# Altium PCB VCU.PcbDoc (part 1 of 2)
Units mm, origin at the board's own origin, x right, y up, seen from the top; angles counter-clockwise.
Board outline 100 x 100 mm, 4 copper layers (Top Layer, Layer 1, Layer 2, Bottom Layer), stack 1.25 mm thick; 153 components, 112 nets, 484 pads, 403 vias.
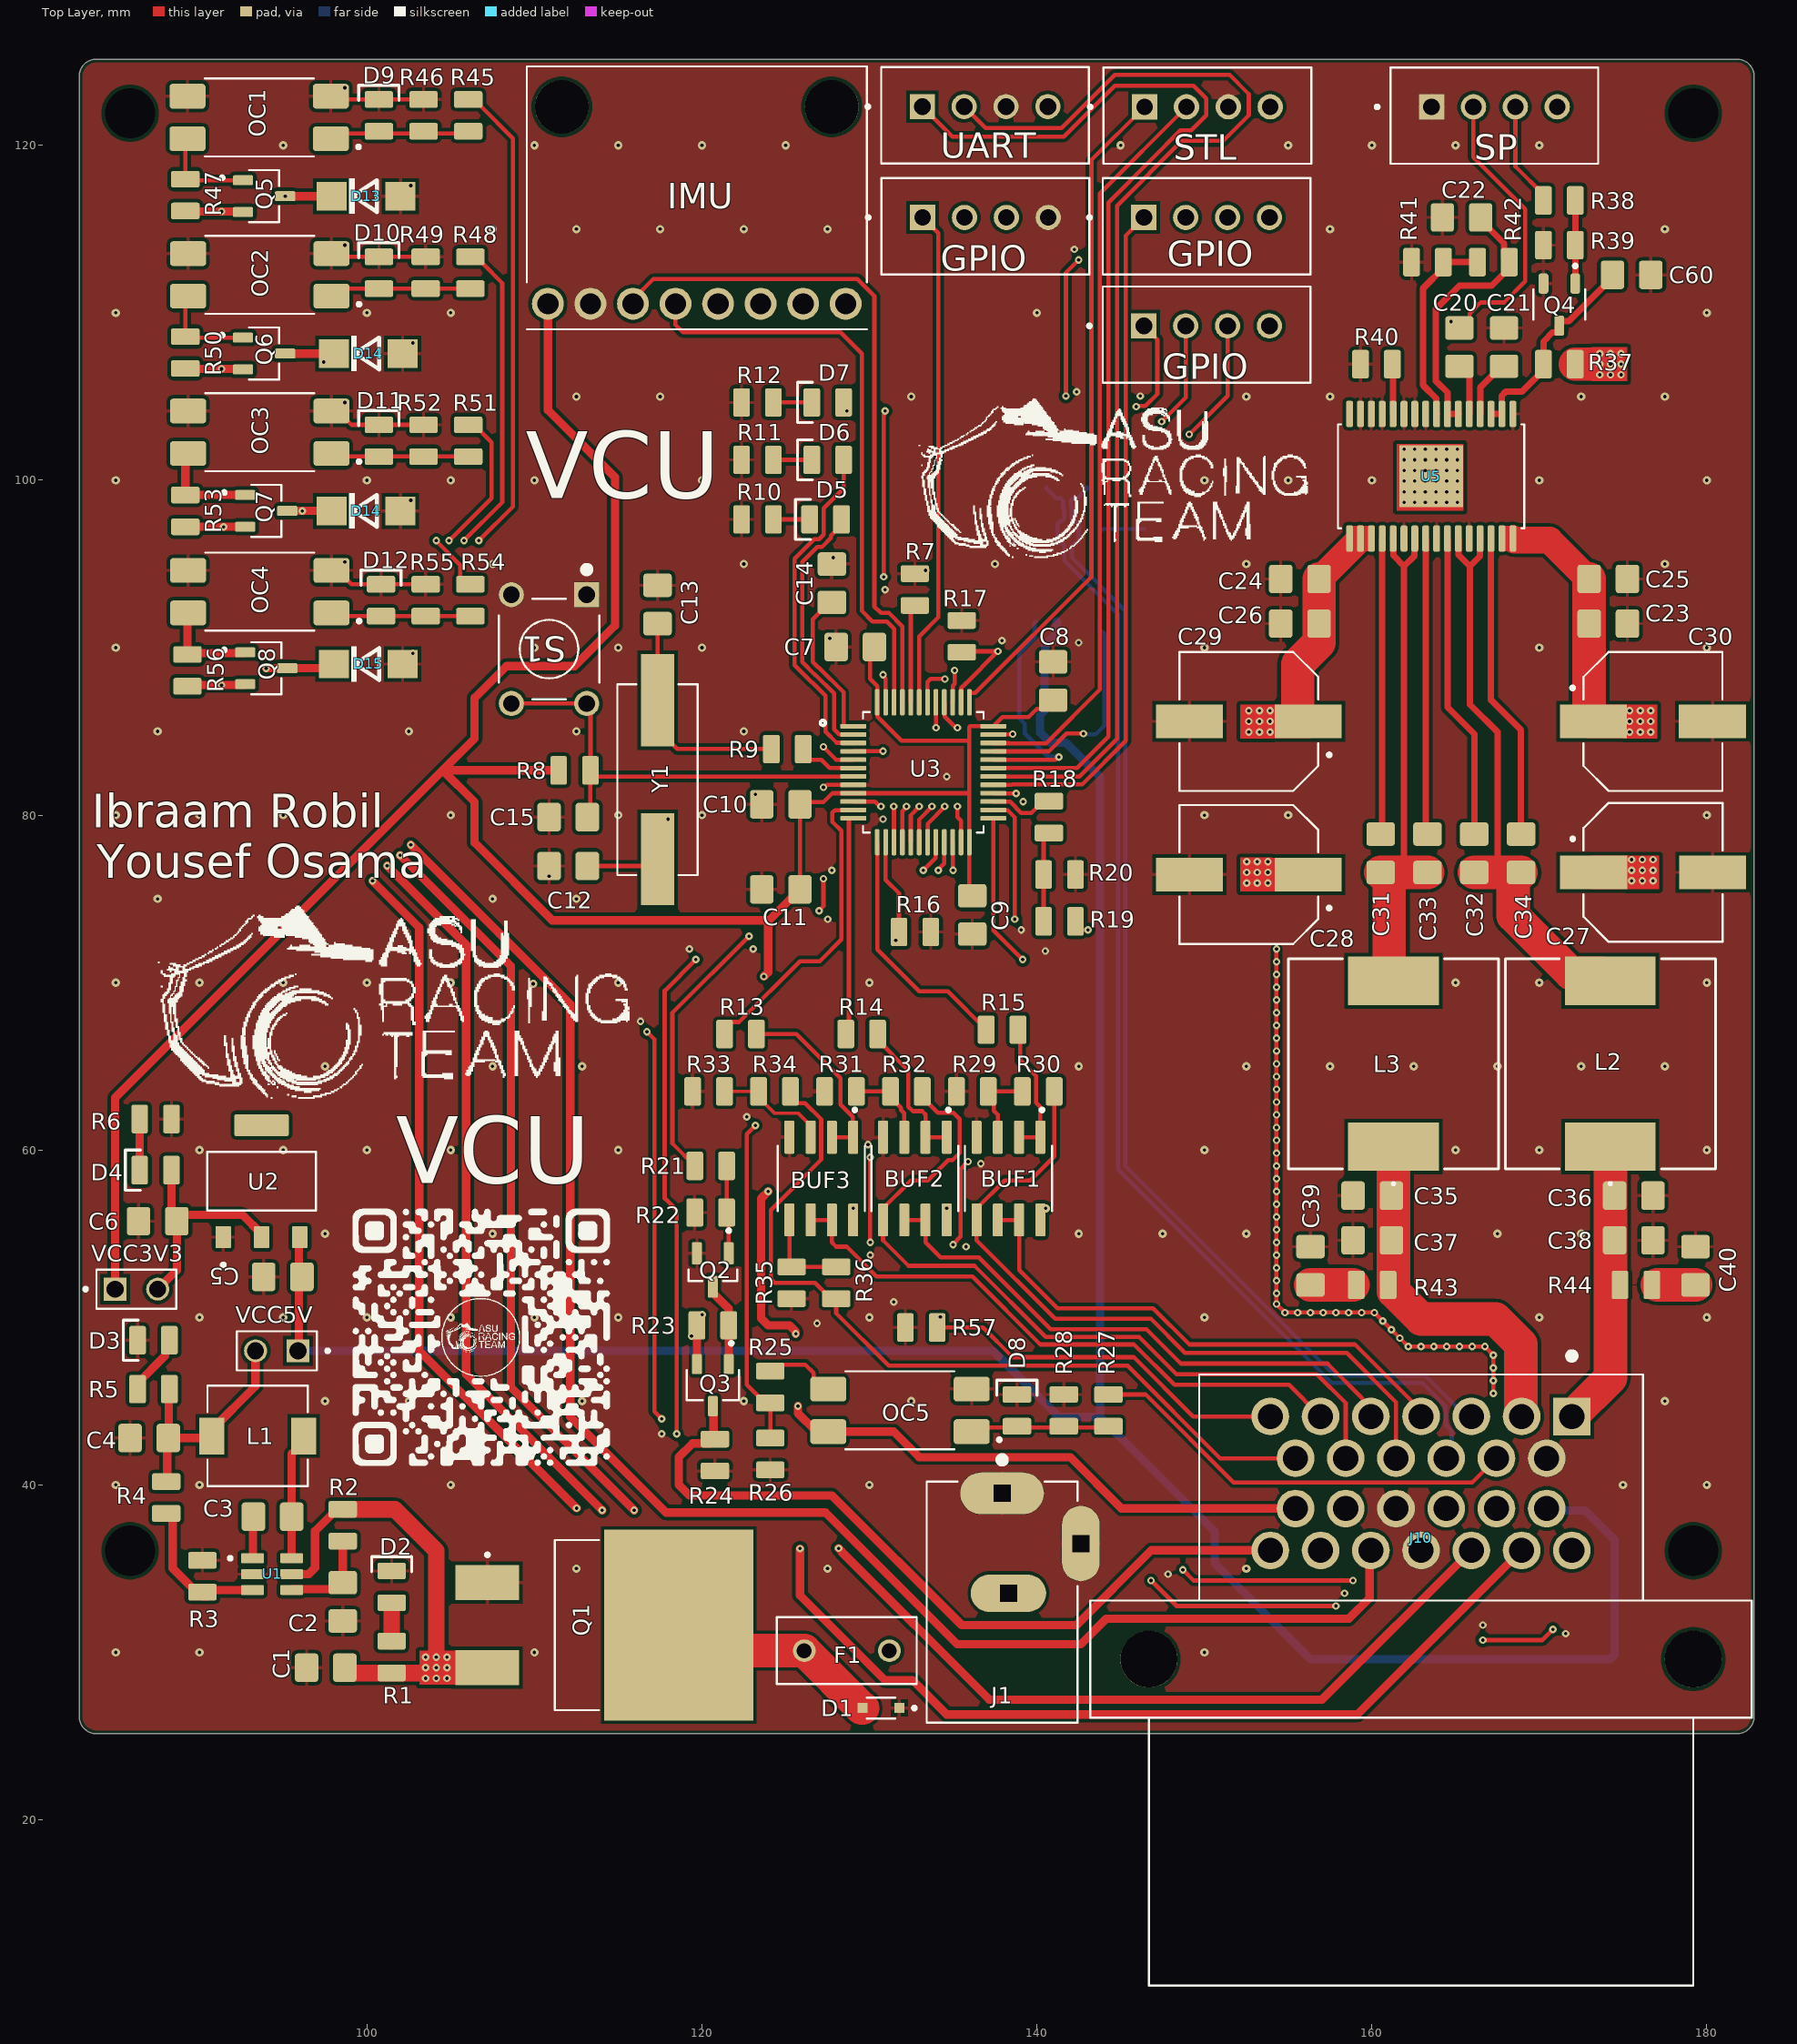
[diagram p0: Top Layer view]
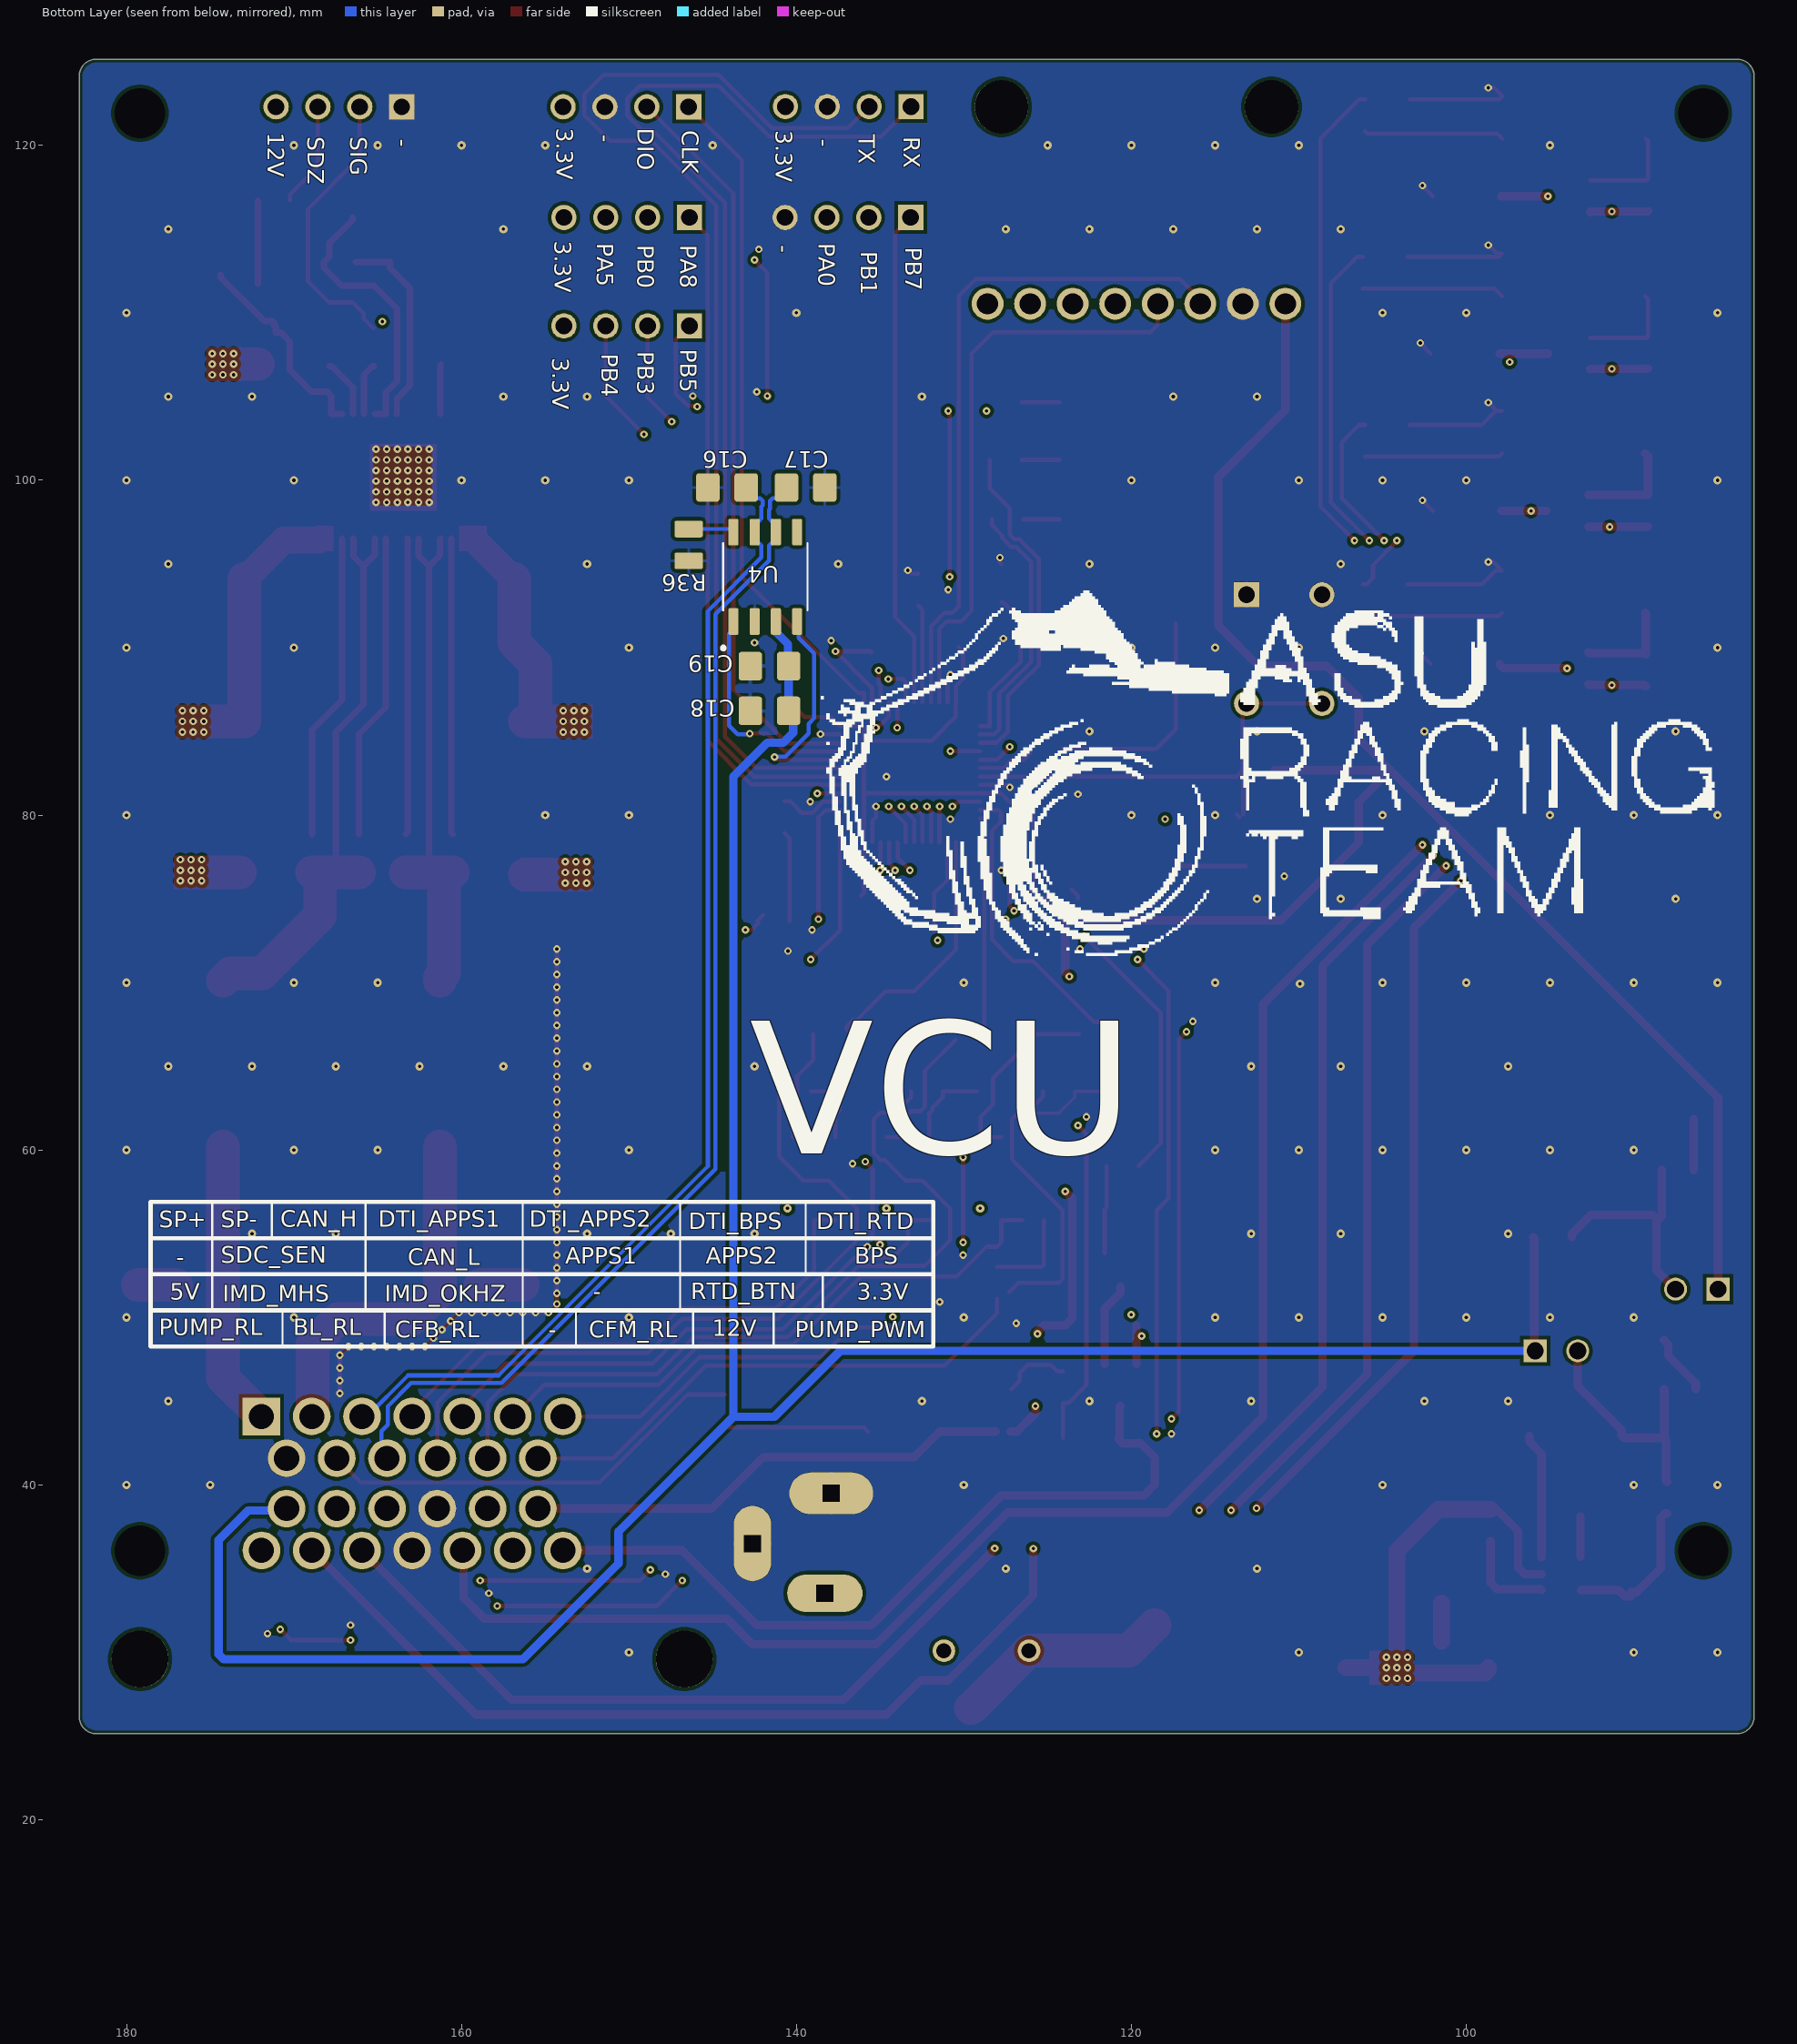
[diagram p1: Bottom Layer view, seen from below]
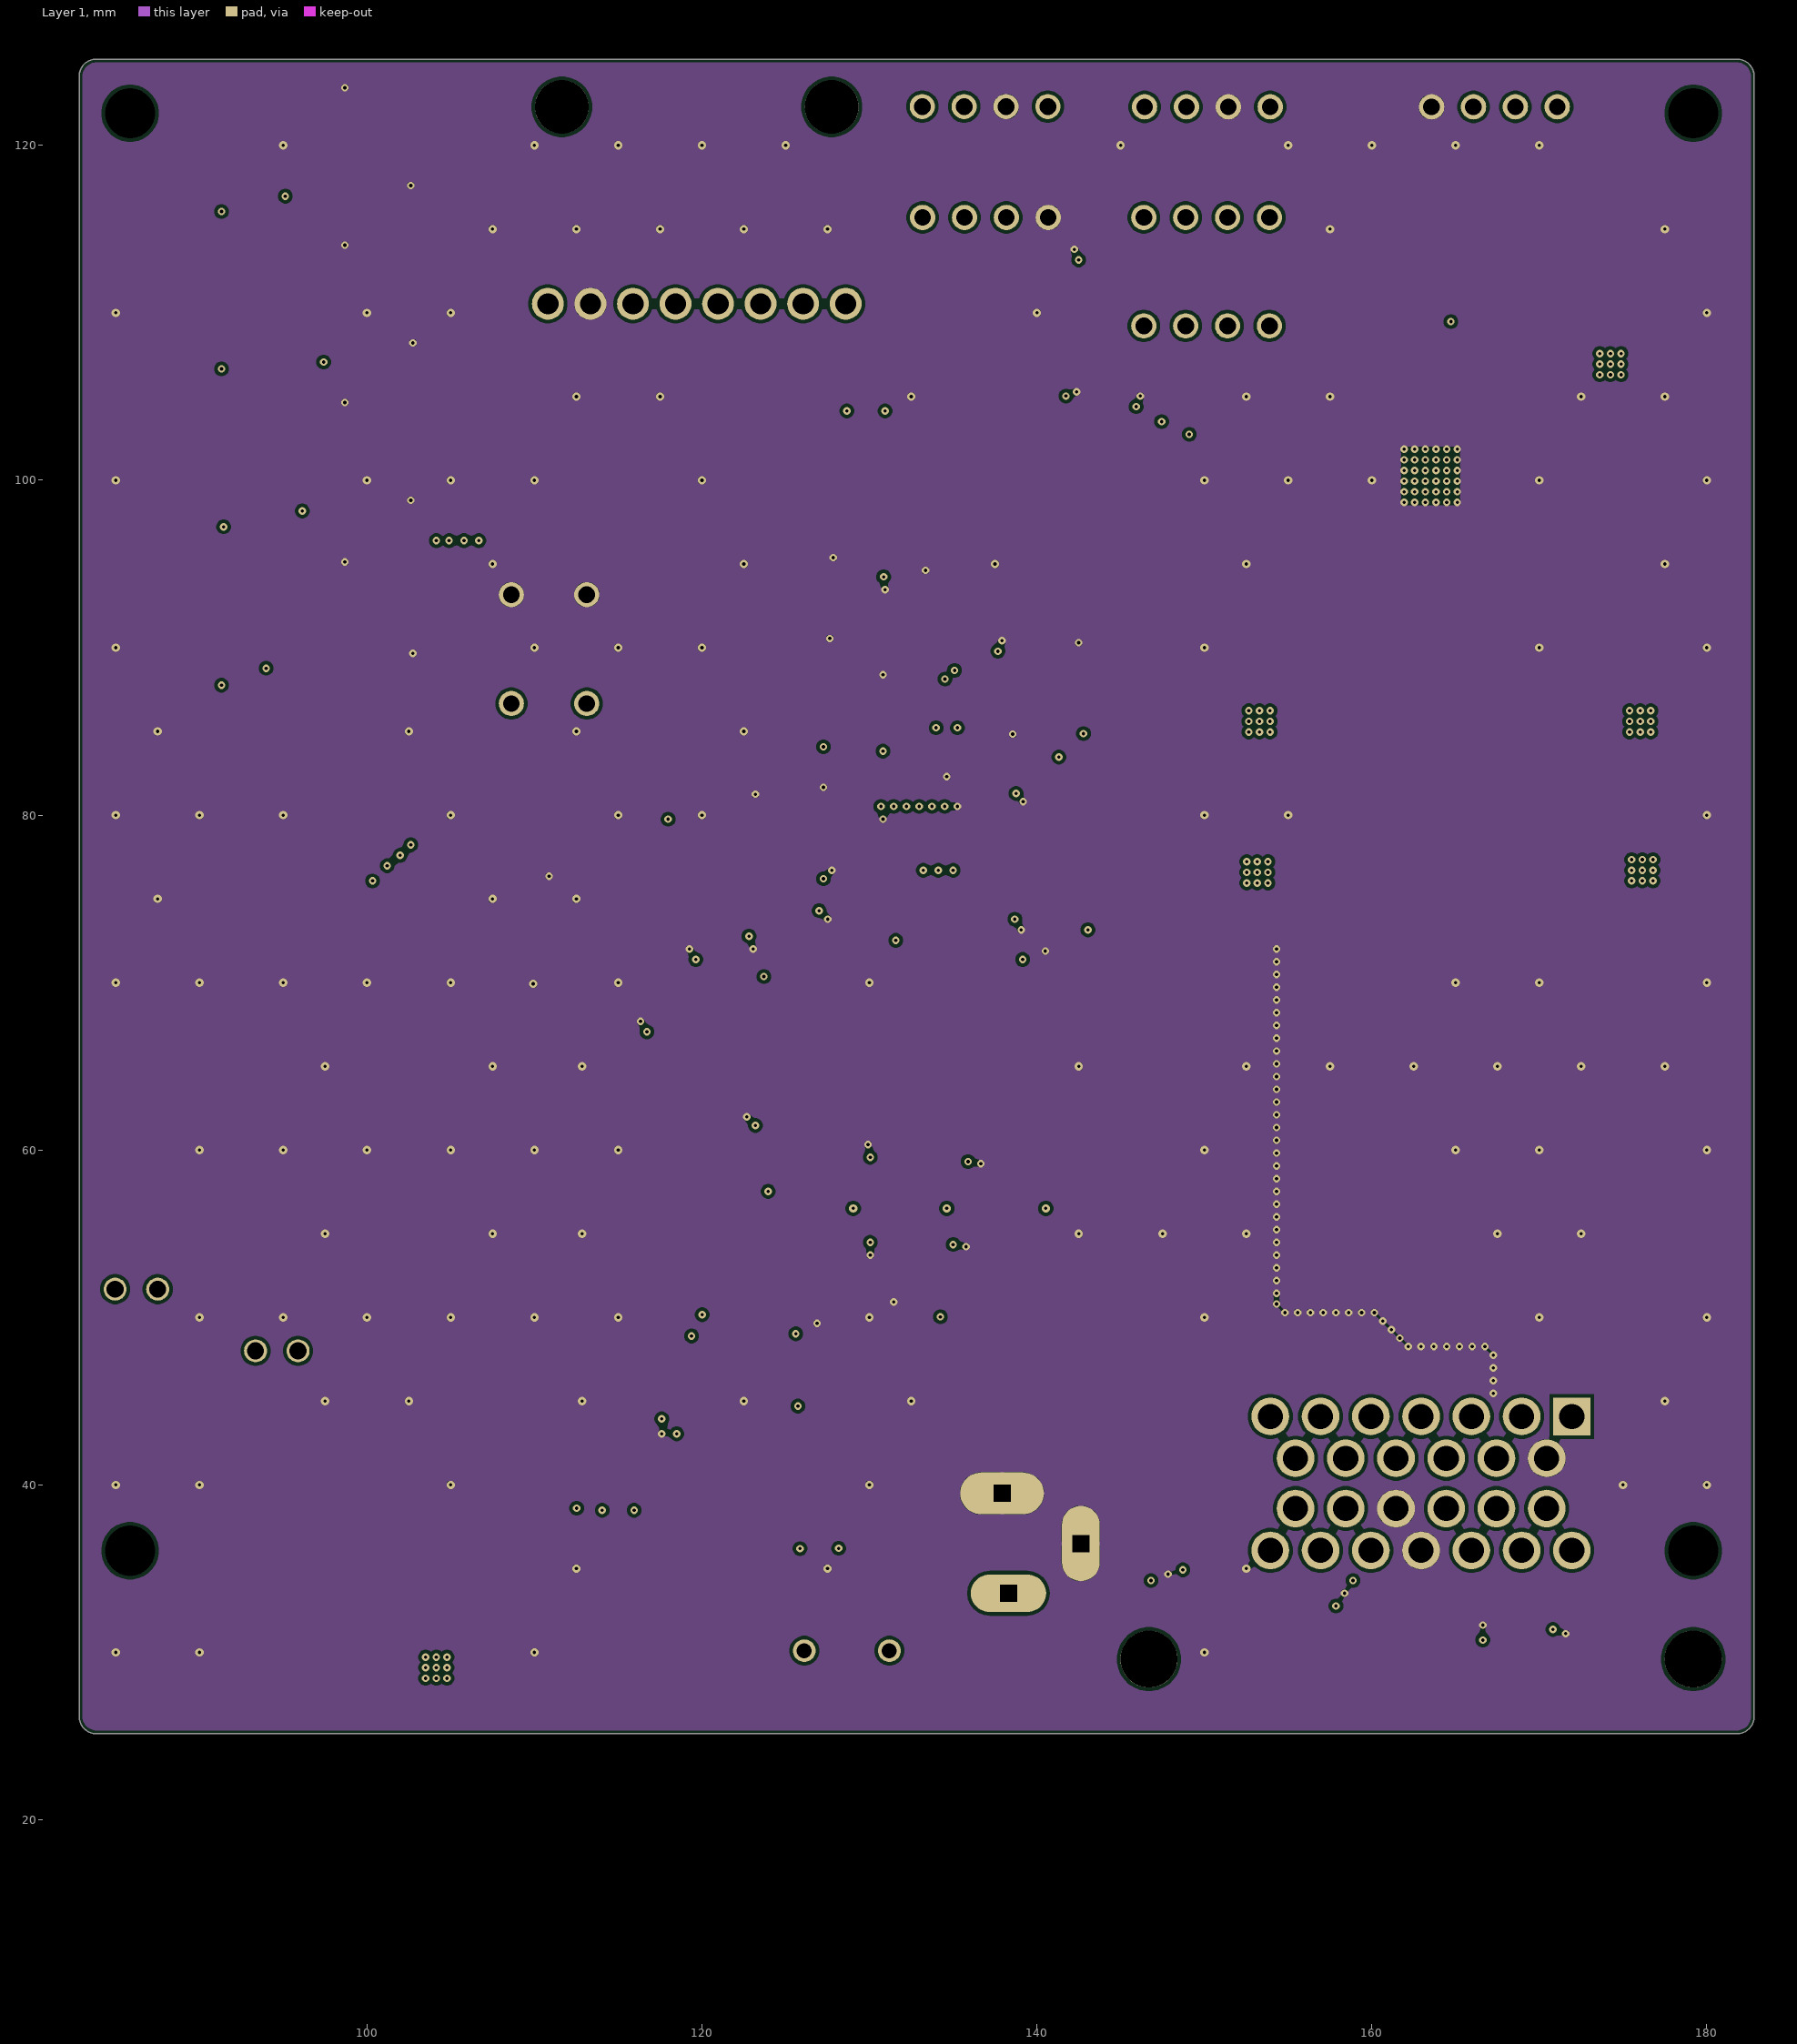
[diagram p2: Layer 1]
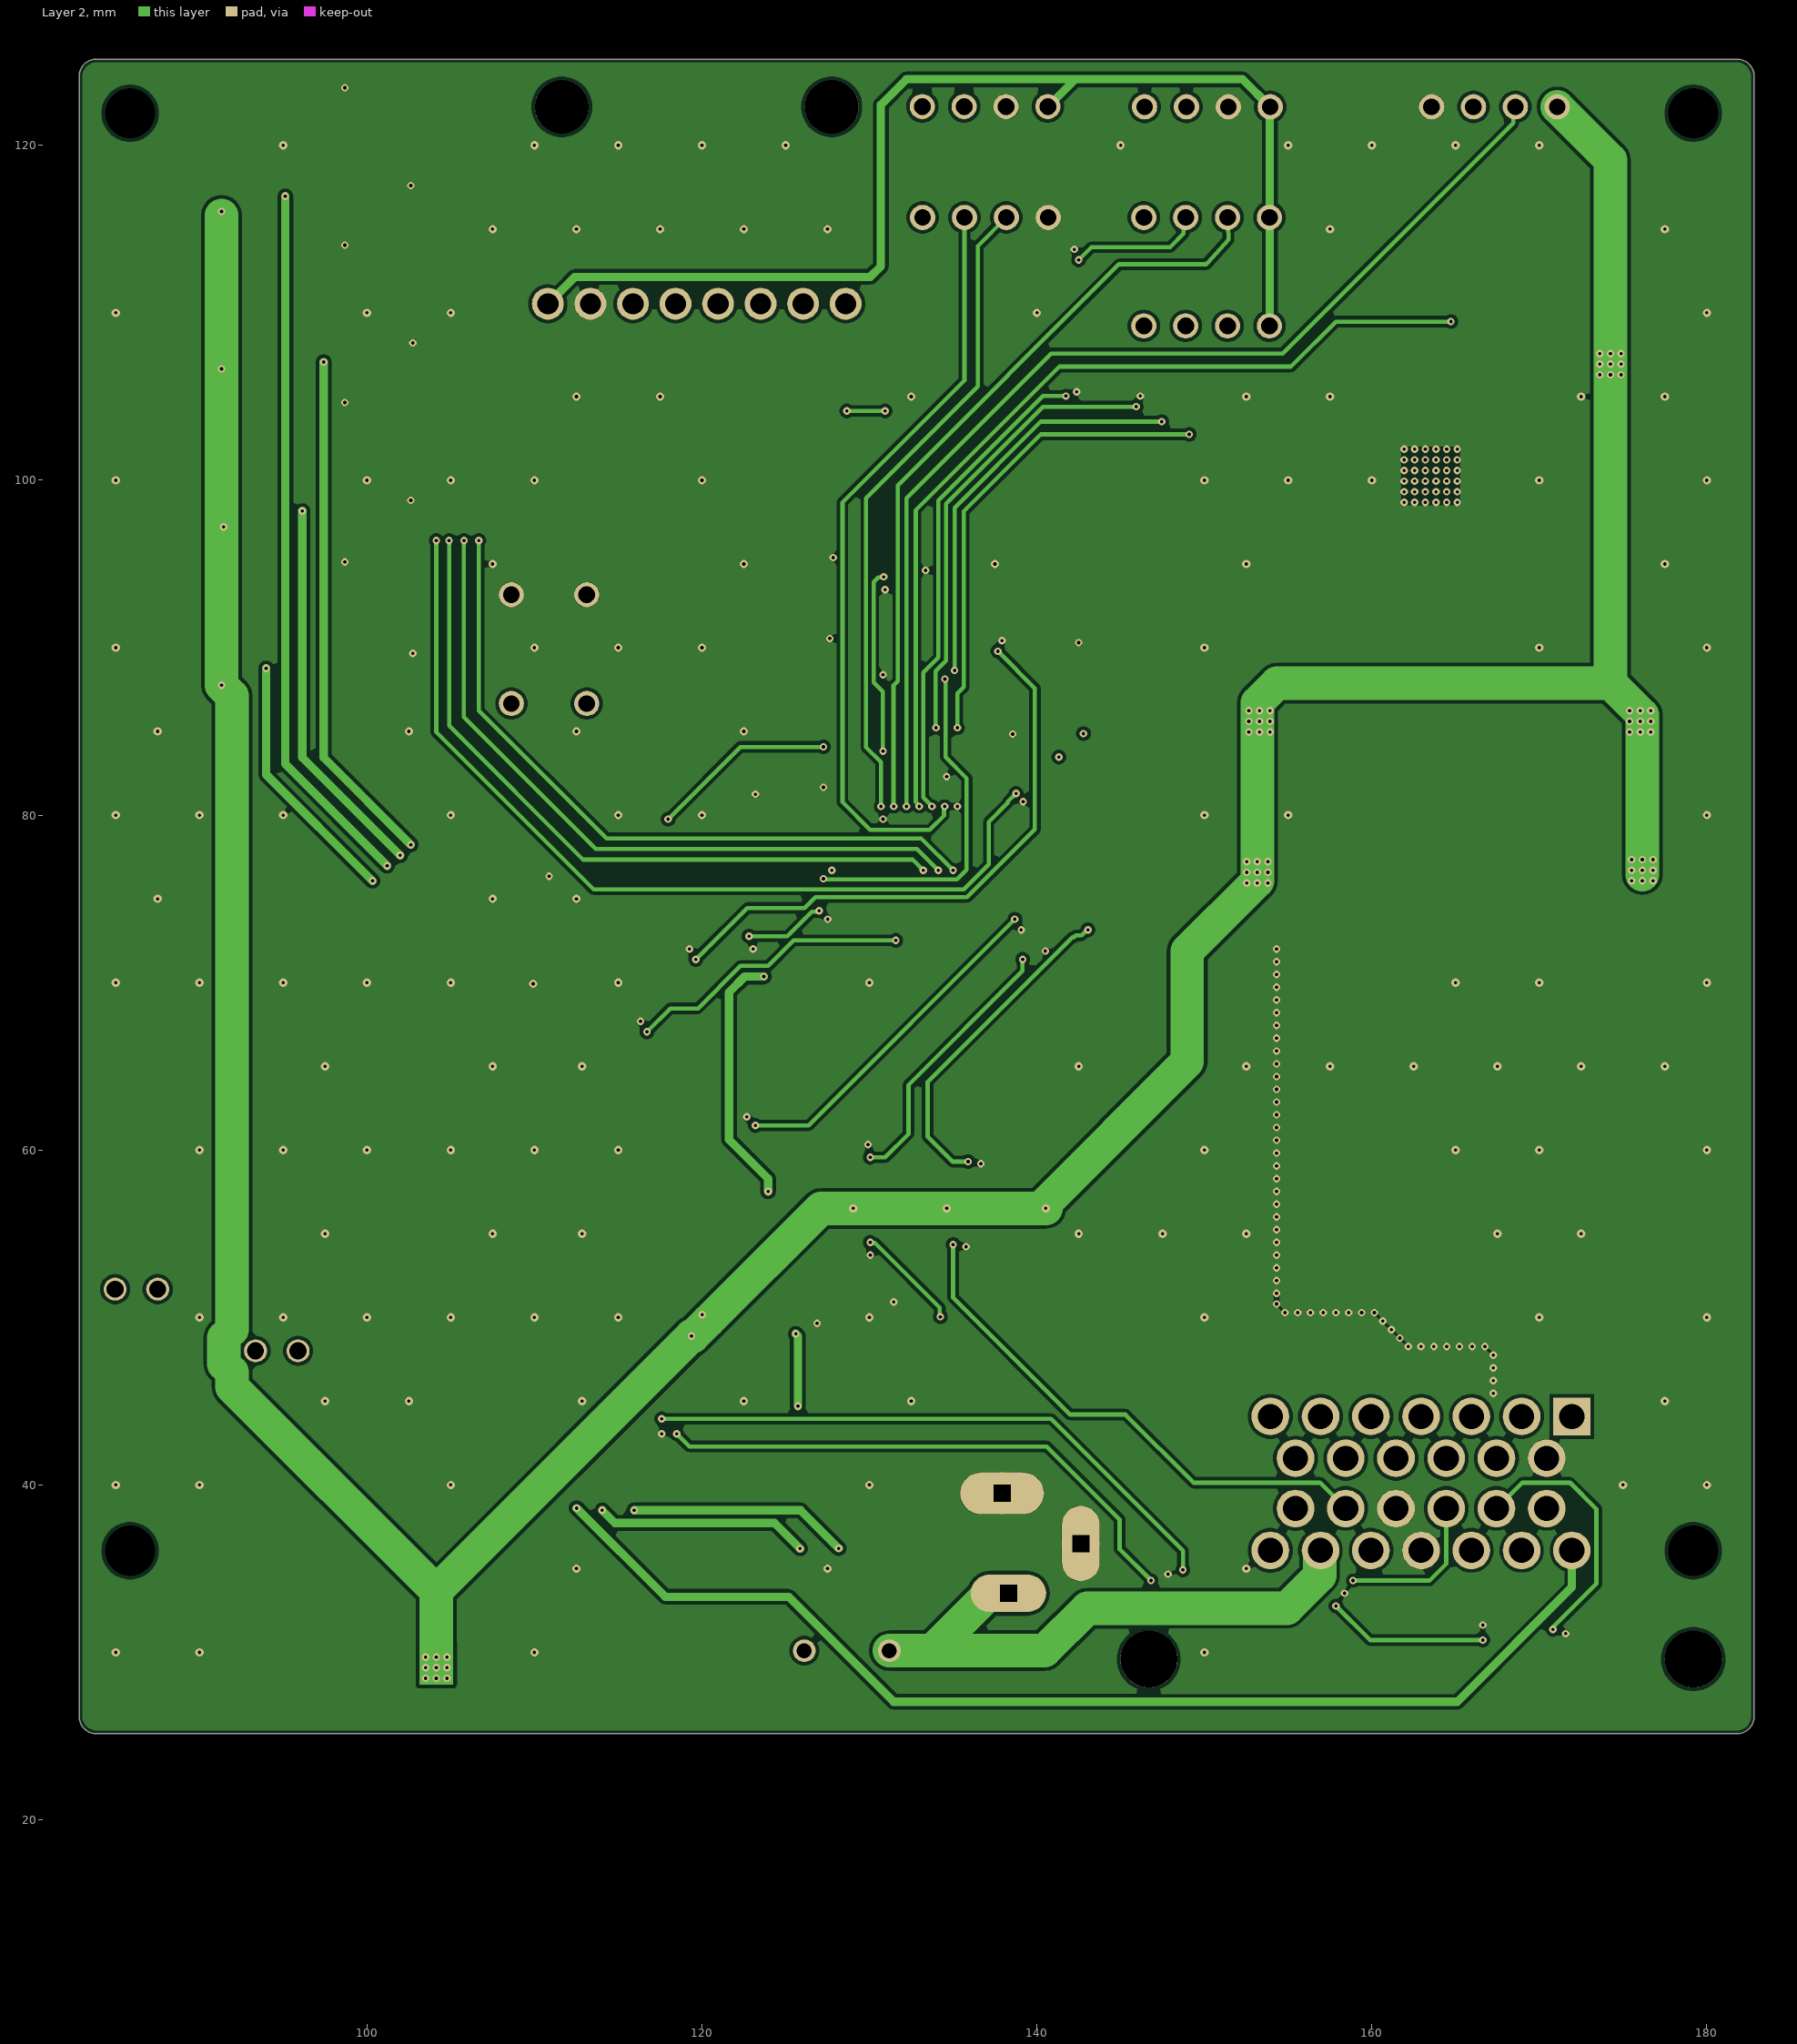
[diagram p3: Layer 2]
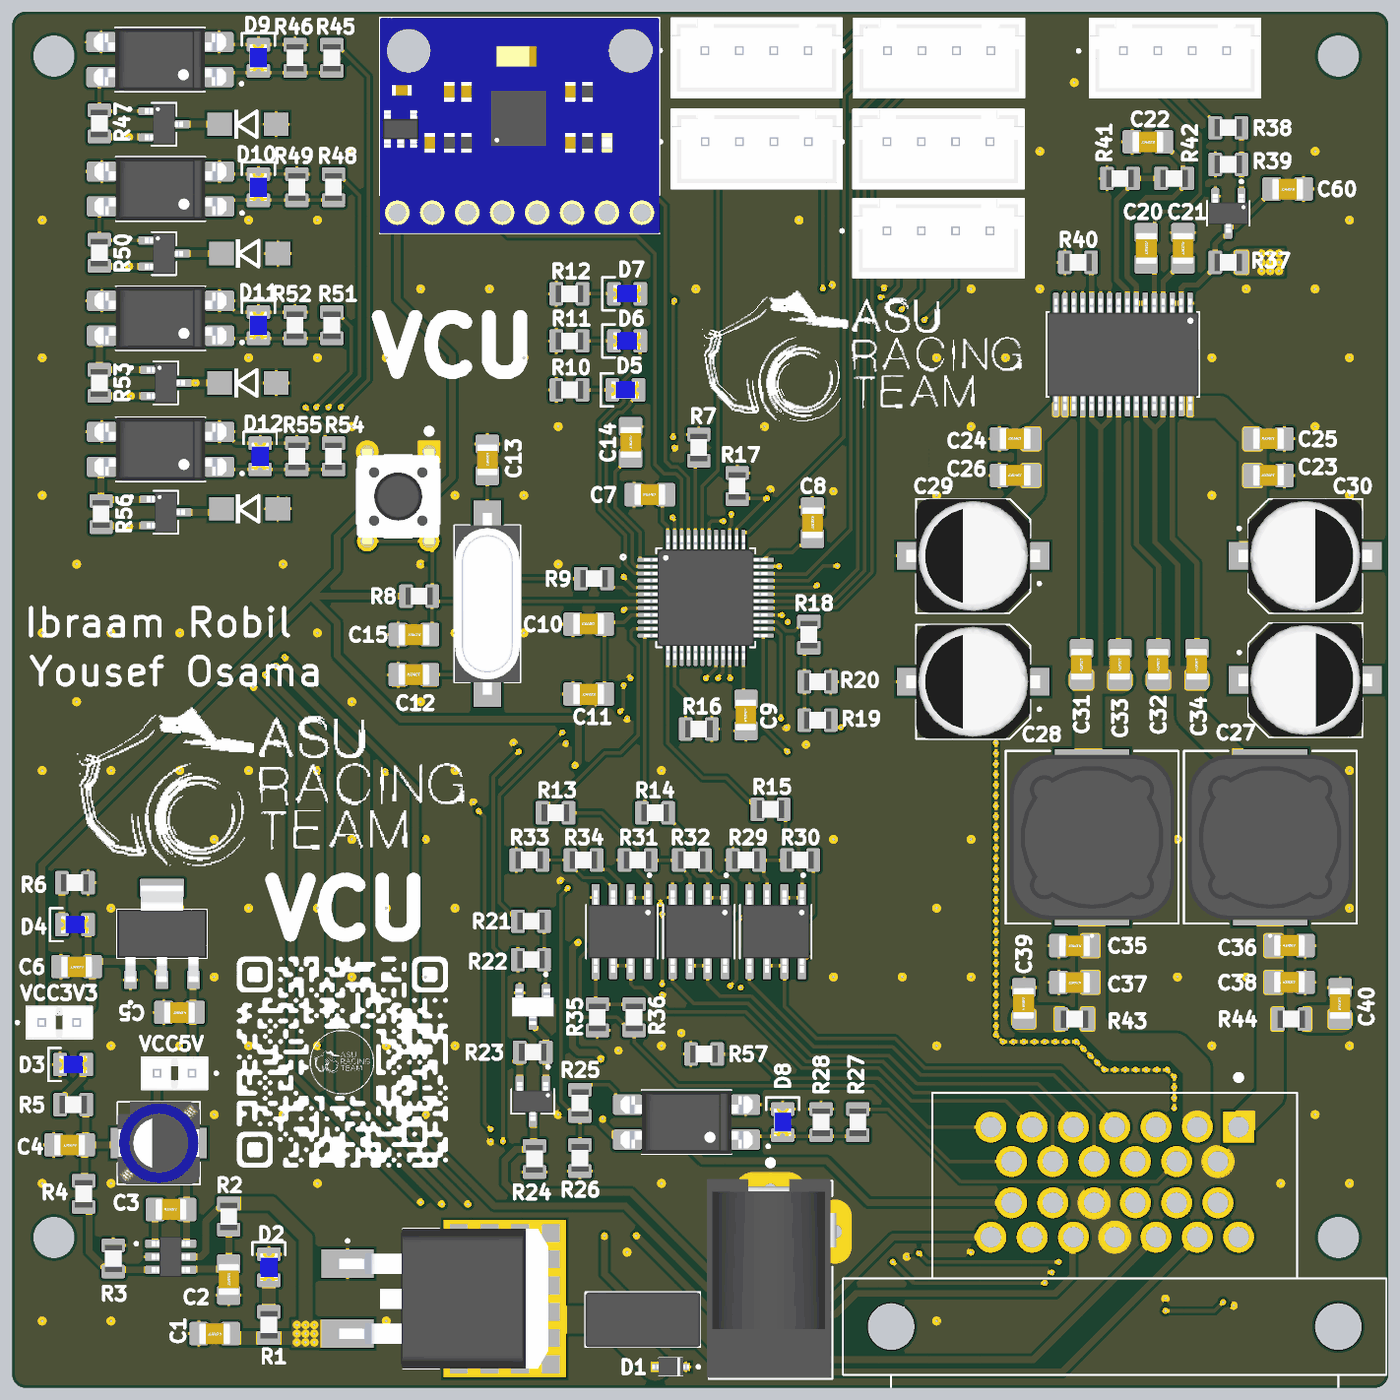
[diagram p5: 3D render of the assembled board from above, using the file's embedded part models]
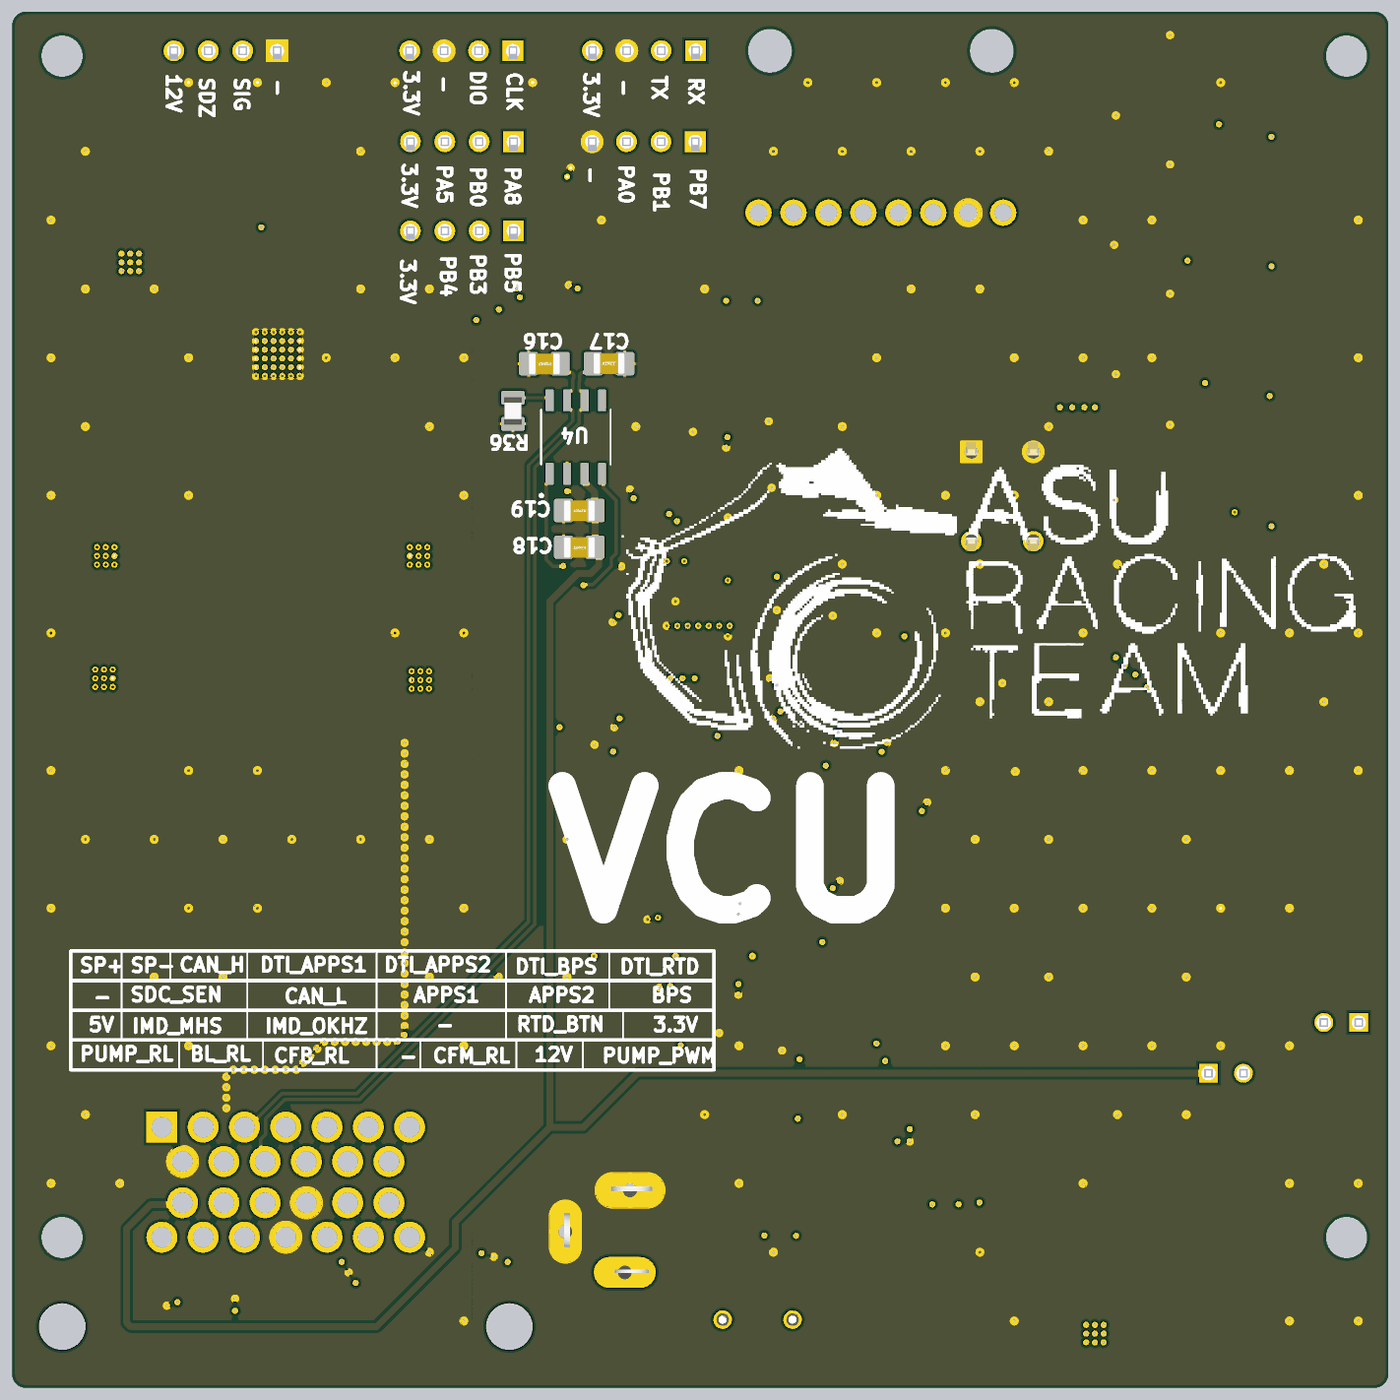
[diagram p6: 3D render of the assembled board from below, using the file's embedded part models]

## Layer stack, top to bottom
Top Solder: solder mask 0.0254, SM-001, Dk 4
Top Layer: signal copper 0.07
Dielectric 2: prepreg 0.1295, PP-017, Dk 4.3
Layer 1: signal copper 0.07
Dielectric 1: core 0.7112, Core-039, Dk 4.8
Layer 2: signal copper 0.07
Dielectric 3: prepreg 0.1295, PP-017, Dk 4.3
Bottom Layer: signal copper 0.07
Bottom Solder: solder mask 0.0254, SM-001, Dk 4

## Board outline
82.82,26.146 82.82,124.146 cw(c83.82,124.146) 83.82,125.146 181.82,125.146 cw(c181.82,124.146) 182.82,124.146 182.82,26.146 cw(c181.82,26.146) 181.82,25.146 83.82,25.146 cw(c83.82,26.146)

## Design rules (kind name [scope] priority, off if disabled: settings)
BoardOutlineClearance [All] p1: gap=0.2 ignorepadtopadclearanceinfootprint=FALSE
Clearance [All] p1: gap=0.203 ignorepadtopadclearanceinfootprint=FALSE
ComponentClearance [All] p1: gap=0.102 collisioncheckmode=3 verticalgap=0.102 showdistances=TRUE
DiffPairsRouting [All] p1: maxlimit=0.203 minlimit=0.203 mostfreqgap=0.203 toplayer_mingap=0.203 toplayer_minwidth=0.203 toplayer_maxwidth=1816.048 toplayer_prefwidth=0.203 midlayer1_maxgap=0.203 midlayer1_prefgap=0.203 midlayer1_minwidth=0.203 midlayer1_maxwidth=1816.048 midlayer1_prefwidth=0.203 midlayer2_maxgap=0.203 midlayer2_prefgap=0.203 midlayer2_minwidth=0.203 midlayer2_maxwidth=1816.048 midlayer2_prefwidth=0.203 bottomlayer_mingap=0.203 bottomlayer_minwidth=0.203 bottomlayer_maxwidth=1816.048 bottomlayer_prefwidth=0.203 maxuncoupledlength=12.7
Height [All] p1: minheight=0 maxheight=1816.048 prefheight=12.7
HoleSize [All] p1: absolutevalues=TRUE maxlimit=6.3 minlimit=0.2 maxpercent=80.000 minpercent=20.000
HoleToHoleClearance [All] p1: gap=0.25 allowstackedmicrovias=FALSE
MinimumAnnularRing [All] p1: minimumring=0.1
MinimumAnnularRing MinimumAnnularRing_1 [IsPad AND HoleType = 'NonPlated'] p2: minimumring=0
MinimumSolderMaskSliver [All] p1: minsoldermaskwidth=0
PlaneClearance PlaneClearanceMidLayer1 [OnLayer('Mid Layer 1')] p1: clearance=0.102
PlaneClearance PlaneClearanceMidLayer2 [OnLayer('Mid Layer 2')] p2: clearance=0.102
PlaneClearance PlaneClearanceTopLayer [OnLayer('Top Layer')] p3: clearance=0.203
PlaneClearance PlaneClearanceBottomLayer [OnLayer('Bottom Layer')] p4: clearance=0.203
PlaneConnect PlaneConnectPowerPads [InPadClass('PowerPads')] p1: planeconnectstyle=Direct reliefexpansion=0.508 reliefentries=4 reliefconductorwidth=0.254 reliefairgap=0.254
PlaneConnect PlaneConnectTopLayer [OnLayer('Top Layer')] p2: pad.planeconnectstyle=Relief pad.reliefexpansion=0.3 pad.reliefentries=4 pad.reliefconductorwidth=0.203 pad.reliefairgap=0.203 via.planeconnectstyle=Direct via.reliefexpansion=0.3 via.reliefentries=4 via.reliefconductorwidth=0.127 via.reliefairgap=0.127
PlaneConnect PlaneConnectBottomLayer [OnLayer('Bottom Layer')] p3: pad.planeconnectstyle=Relief pad.reliefexpansion=0.3 pad.reliefentries=4 pad.reliefconductorwidth=0.203 pad.reliefairgap=0.203 via.planeconnectstyle=Direct via.reliefexpansion=0.3 via.reliefentries=4 via.reliefconductorwidth=0.127 via.reliefairgap=0.127
PlaneConnect PlaneConnectMidLayer1 [OnLayer('Mid Layer 1')] p4: pad.planeconnectstyle=Relief pad.reliefexpansion=0.3 pad.reliefentries=4 pad.reliefconductorwidth=0.102 pad.reliefairgap=0.102 via.planeconnectstyle=Direct via.reliefexpansion=0.3 via.reliefentries=4 via.reliefconductorwidth=0.127 via.reliefairgap=0.127
PlaneConnect PlaneConnectMidLayer2 [OnLayer('Mid Layer 2')] p5: pad.planeconnectstyle=Relief pad.reliefexpansion=0.3 pad.reliefentries=4 pad.reliefconductorwidth=0.102 pad.reliefairgap=0.102 via.planeconnectstyle=Direct via.reliefexpansion=0.3 via.reliefentries=4 via.reliefconductorwidth=0.127 via.reliefairgap=0.127
PolygonConnect PolygonConnectPowerPads [All vs (InPadClass('PowerPads'))] p1: connectstyle=Direct reliefconductorwidth=0.254 reliefentries=4 polygonreliefangle="90 Angle" airgapwidth=0.254
PolygonConnect PolygonConnectMidLayer1 [OnLayer('Mid Layer 1') vs OnLayer('Mid Layer 1')] p2: thpad.connectstyle=Relief thpad.reliefconductorwidth=0.102 thpad.reliefentries=4 thpad.polygonreliefangle="90 Angle" thpad.airgapwidth=0.102 smdpad.connectstyle=Relief smdpad.reliefconductorwidth=0.102 smdpad.reliefentries=4 smdpad.polygonreliefangle="90 Angle" smdpad.airgapwidth=0.102 via.connectstyle=Direct via.reliefconductorwidth=0.127 via.reliefentries=4 via.polygonreliefangle="90 Angle" via.airgapwidth=0.127
PolygonConnect PolygonConnectMidLayer2 [OnLayer('Mid Layer 2') vs OnLayer('Mid Layer 2')] p3: thpad.connectstyle=Relief thpad.reliefconductorwidth=0.102 thpad.reliefentries=4 thpad.polygonreliefangle="90 Angle" thpad.airgapwidth=0.102 smdpad.connectstyle=Relief smdpad.reliefconductorwidth=0.102 smdpad.reliefentries=4 smdpad.polygonreliefangle="90 Angle" smdpad.airgapwidth=0.102 via.connectstyle=Direct via.reliefconductorwidth=0.127 via.reliefentries=4 via.polygonreliefangle="90 Angle" via.airgapwidth=0.127
PolygonConnect PolygonConnectTopLayer [OnLayer('Top Layer') vs OnLayer('Top Layer')] p4: thpad.connectstyle=Relief thpad.reliefconductorwidth=0.203 thpad.reliefentries=4 thpad.polygonreliefangle="90 Angle" thpad.airgapwidth=0.203 smdpad.connectstyle=Relief smdpad.reliefconductorwidth=0.203 smdpad.reliefentries=4 smdpad.polygonreliefangle="90 Angle" smdpad.airgapwidth=0.203 via.connectstyle=Direct via.reliefconductorwidth=0.127 via.reliefentries=4 via.polygonreliefangle="90 Angle" via.airgapwidth=0.127
PolygonConnect PolygonConnectBottomLayer [OnLayer('Bottom Layer') vs OnLayer('Bottom Layer')] p5: thpad.connectstyle=Relief thpad.reliefconductorwidth=0.203 thpad.reliefentries=4 thpad.polygonreliefangle="90 Angle" thpad.airgapwidth=0.203 smdpad.connectstyle=Relief smdpad.reliefconductorwidth=0.203 smdpad.reliefentries=4 smdpad.polygonreliefangle="90 Angle" smdpad.airgapwidth=0.203 via.connectstyle=Direct via.reliefconductorwidth=0.127 via.reliefentries=4 via.polygonreliefangle="90 Angle" via.airgapwidth=0.127
RoutingVias [All] p1: holewidth=0.2 width=0.45 viastyle="Through Hole" minholewidth=0.2 minwidth=0.45 maxholewidth=6.3 maxwidth=6.55
SilkToSilkClearance [All] p1: silktosilkclearance=0
SilkToSolderMaskClearance [IsPad] p1: minsilkscreentomaskgap=0.102 clearancetoexposedcopper=TRUE
SolderMaskExpansion [All] p1: expansion=0.075 istentingtop=FALSE
SupplyNets "Schematic Supply Nets_7" [InNet('VCC5VB')] p1: voltage=0.000
SupplyNets "Schematic Supply Nets_6" [InNet('VCC5V')] p2: voltage=0.000
SupplyNets "Schematic Supply Nets_5" [InNet('VCC3V3')] p3: voltage=0.000
SupplyNets "Schematic Supply Nets_4" [InNet('DC_Fuse_12V')] p4: voltage=0.000
SupplyNets "Schematic Supply Nets_3" [InNet('GND')] p5: voltage=0.000
SupplyNets "Schematic Supply Nets_2" [InNet('VCC12V')] p6: voltage=0.000
SupplyNets "Schematic Supply Nets_1" [InNet('VCC3V3L')] p7: voltage=0.000
SupplyNets "Schematic Supply Nets" [InNet('DC_IN_12V')] p8: voltage=0.000
Width [All] p1: maxlimit=1816.048 minlimit=0.102 preferedwidth=0.203 toplayer_minwidth=0.203 midlayer1_prefwidth=0.102 midlayer2_prefwidth=0.102 bottomlayer_minwidth=0.203 minimp=50.000000 maximp=50.000000 favimp=50.000000
20 further rules are at their usual default settings.

## Classes and differential pairs
component class VCU: BUF1 BUF2 BUF3 C4 C9 C11 C12 C13 C14 C16 C18 C19 C20 C23 C24 C25 C26 C27 C31 C35 C38 C60 D1 D2 D3 D4 D5 D6 D10 D11 D12 D15 F1 GPIO IMU J1 J10 L2 L3 OC1 OC2 OC3 OC4 OC5 Q1 Q2 Q3 Q4 Q5 Q6 Q7 Q8 R1 R2 R3 R4 R5 R6 R7 R8 R9 R10 R12 R17 R20 R21 R25 R30 R31 R33 R34 R36 R38 R41 R42 R44 R48 R52 R54 R56 R57 S1 SP STL U1 U2 U3 U4 U5 UART VCC3V3 VCC5V Y1
differential pair CAN: +CAN_P -CAN_N

## Components (designator, comment, footprint, x,y, rotation, side; value= is the part's Value field where it differs from the comment)
BUF1 "TLV9062IDR" SOIC127P599X175-8N#1 138.303,58.293 r270 top
BUF2 "TLV9062IDR" SOIC127P599X175-8N#1 132.715,58.293 r270 top
BUF3 "TLV9062IDR" SOIC127P599X175-8N#1 127.127,58.293 r270 top
C1 "100nF" CAP_0805 97.536,29.083 r180 top
C2 "100nF" CAP_0805 98.552,33.02 r270 top
C3 "100nF" CAP_0805 94.361,38.1 r0 top
C4 "100nF" CAP_0805 86.995,42.799 r180 top
C5 "2.2uF" CAP_0805 94.974,52.426 r180 top
C6 "2.2uF" CAP_0805 87.503,55.753 r180 top
C7 "100nF" CAP_0805 129.159,90.043 r0 top
C8 "100nF" CAP_0805 140.97,88.011 r270 top
C9 "100nF" CAP_0805 136.144,74.041 r90 top
C10 "100nF" CAP_0805 124.714,80.645 r0 top
C11 "2.2uF" CAP_0805 124.714,75.565 r180 top
C12 "20pF" CAP_0805 112.014,76.962 r0 top
C13 "20pF" CAP_0805 117.348,92.583 r270 top
C14 "100nF" CAP_0805 127.762,93.853 r270 top
C15 "100nF" CAP_0805 112.014,79.883 r180 top
C16 "20pF" CAP_0805 144.145,99.568 r0 bottom
C17 "20pF" CAP_0805 139.446,99.568 r180 bottom
C18 "100nF" CAP_0805 141.605,86.233 r0 bottom
C19 "100nF" CAP_0805 141.605,88.9 r0 bottom
C20 "1uF" CAP_0805 165.227,107.95 r270 top
C21 "1uF" CAP_0805 167.894,107.95 r270 top
C22 "1uF" CAP_0805 165.354,115.697 r180 top
C23 "1nF" CAP_0805 174.117,91.44 r0 top
C24 "1nF" CAP_0805 155.702,94.107 r0 top
C25 "100nF" CAP_0805 174.117,94.107 r0 top
C26 "100nF" CAP_0805 155.702,91.44 r0 top
C27 "220uF 35V" CAP_EEEFT1E471AP 176.79,76.581 r0 top
C28 "330uF 35V" CAP_EEEFT1E471AP 152.654,76.454 r180 top
C29 "220uF 35V" CAP_EEEFT1E471AP 152.654,85.598 r180 top
C30 "330uF 35V" CAP_EEEFT1E471AP 176.784,85.598 r0 top
C31 "220nF" CAP_0805 160.528,77.724 r90 top
C32 "220nF" CAP_0805 166.116,77.724 r90 top
C33 "220nF" CAP_0805 163.322,77.724 r90 top
C34 "220nF" CAP_0805 168.91,77.724 r90 top
C35 "1uF" CAP_0805 160.02,57.277 r180 top
C36 "1uF" CAP_0805 175.641,57.277 r0 top
C37 "1nF" CAP_0805 160.02,54.61 r180 top
C38 "1nF" CAP_0805 175.641,54.61 r0 top
C39 "10nF" CAP_0805 156.337,53.086 r90 top
C40 "10nF" CAP_0805 179.324,53.086 r90 top
C60 "1uF" CAP_0805 175.514,112.268 r180 top
D1 "PESD1LIN" DIO_PESD1LIN 130.683,26.67 r180 top
D2 "BLUE" LED_0805_BLUE 101.473,33.909 r270 top
D3 "BLUE" LED_0805_BLUE 87.249,48.641 r0 top
D4 "BLUE" LED_0805_BLUE 87.376,58.801 r0 top
D5 "BLUE" LED_0805_BLUE 127.381,97.663 r0 top
D6 "BLUE" LED_0805_BLUE 127.508,101.219 r0 top
D7 "BLUE" LED_0805_BLUE 127.508,104.648 r0 top
D8 "BLUE" LED_0805_BLUE 138.811,44.45 r270 top
D9 "BLUE" LED_0805_BLUE 100.711,121.793 r270 top
D10 "BLUE" LED_0805_BLUE 100.711,112.395 r270 top
D11 "BLUE" LED_0805_BLUE 100.711,102.362 r270 top
D12 "BLUE" LED_0805_BLUE 100.838,92.837 r270 top
D13 "SS34-A" DO-214AC 99.949,116.967 r0 top
D14 "SS34-A" DO-214AC 99.949,98.171 r0 top
D14 "SS34-A" DO-214AC 100.076,107.569 r0 top
D15 "SS34-A" DO-214AC 100.076,89.027 r0 top
F1 "0697H0315-01" FUSRR508W60L835T400H810 128.651,30.099 r180 top
GPIO "B4B-XH-A" JST_B4B-XH-A 150.134,108.695 r180 top
GPIO "B4B-XH-A" JST_B4B-XH-A 150.134,115.172 r180 top
GPIO "B4B-XH-A" JST_B4B-XH-A 136.926,115.172 r180 top
IMU "GY-521" MODULE_GY-521 119.693,116.871 r90 top
J1 "PJ-002B" CUI_PJ-002B 137.922,39.497 r270 top
J10 "9-6437287-8" TE_9-6437287-8 162.941,29.591 r0 top
L1 "SLF6028T-100M1R3-PF" IND_SLF6028T-100M1R3-PF 93.472,42.926 r0 top
L2 "10uH" IND_CDRH127/LDNP-470MC_SUM 174.244,65.151 r90 top
L3 "10uH" IND_CDRH127/LDNP-470MC_SUM 161.29,65.151 r90 top
OC1 "TLP785(GB-TP6,F)" SOIC254P960X420-4N 93.561,121.666 r180 top
OC2 "TLP785(GB-TP6,F)" SOIC254P960X420-4N 93.599,112.268 r180 top
OC3 "TLP785(GB-TP6,F)" SOIC254P960X420-4N 93.599,102.87 r180 top
OC4 "TLP785(GB-TP6,F)" SOIC254P960X420-4N 93.599,93.345 r180 top
OC5 "TLP785(GB-TP6,F)" SOIC254P960X420-4N 131.826,44.45 r180 top
Q1 "IRF4905STRRPBF" TRANS_IRF4905STRRPBF 114.173,31.623 r0 top
Q2 "BC817-40" SOT95P240X120-3N 120.65,52.832 r270 top
Q3 "AO3407A" SOT95P280X125-3N#1 120.65,45.959 r270 top
Q4 "AO3400A" SOT95P280X125-3N#2 171.196,110.49 r270 top
Q5 "AO3407A" SOT95P280X125-3N#1 93.853,116.967 r0 top
Q6 "AO3407A" SOT95P280X125-3N#1 93.853,107.569 r0 top
Q7 "AO3407A" SOT95P280X125-3N#1 93.98,98.171 r0 top
Q8 "AO3407A" SOT95P280X125-3N#1 93.98,88.773 r0 top
R1 "5K" RES_0805 101.473,29.718 r270 top
R2 "10K" RES_0805 98.552,37.592 r90 top
R3 "15K" RES_0805 90.17,34.544 r270 top
R4 "110K" RES_0805 88.011,39.243 r90 top
R5 "1.5K" RES_0805 87.249,45.72 r0 top
R6 "1.5K" RES_0805 87.376,61.849 r0 top
R7 "2.2K" RES_0805 132.715,93.472 r270 top
R8 "10K" RES_0805 112.395,82.677 r180 top
R9 "1K" RES_0805 125.095,83.947 r180 top
R10 "200R" RES_0805 123.317,97.663 r180 top
R11 "200R" RES_0805 123.317,101.219 r180 top
R12 "200R" RES_0805 123.317,104.648 r180 top
R13 "200R" RES_0805 122.301,66.929 r0 top
R14 "200R" RES_0805 129.54,66.929 r0 top
R15 "200R" RES_0805 137.922,67.183 r0 top
R16 "2.2k" RES_0805 132.715,73.025 r0 top
R17 "2.2k" RES_0805 135.509,90.678 r90 top
R18 "200R" RES_0805 140.716,79.883 r270 top
R19 "10K" RES_0805 141.351,73.66 r0 top
R20 "20K" RES_0805 141.351,76.454 r0 top
R21 "200R" RES_0805 120.523,59.055 r180 top
R22 "10K" RES_0805 120.523,56.261 r180 top
R23 "2K" RES_0805 120.65,49.53 r180 top
R24 "2K" RES_0805 120.777,41.783 r90 top
R25 "200R" RES_0805 124.079,45.847 r270 top
R26 "10k" RES_0805 124.079,41.849 r270 top
R27 "200R" RES_0805 144.272,44.45 r90 top
R28 "10K" RES_0805 141.605,44.45 r270 top
R29 "20K" RES_0805 136.144,63.5 r180 top
R30 "10K" RES_0805 140.081,63.5 r0 top
R31 "20K" RES_0805 128.27,63.5 r180 top
R32 "10K" RES_0805 132.207,63.5 r0 top
R33 "7K" RES_0805 120.396,63.5 r180 top
R34 "20K" RES_0805 124.333,63.5 r0 top
R35 "14K" RES_0805 125.349,52.07 r270 top
R36 "20K" RES_0805 128.016,52.07 r270 top
R36 "10K" RES_0805 146.431,96.139 r270 bottom
R37 "100K" RES_0805 171.196,106.934 r180 top
R38 "1K" RES_0805 171.196,116.713 r0 top
R39 "10K" RES_0805 171.196,114.046 r0 top
R40 "100K" RES_0805 160.274,106.934 r0 top
R41 "47K" RES_0805 163.322,113.03 r180 top
R42 "75K" RES_0805 167.259,113.03 r180 top
R43 "39K" RES_0805 160.02,51.943 r180 top
R44 "39K" RES_0805 175.768,51.943 r0 top
R45 "220R" RES_0805 106.045,121.793 r270 top
R46 "10K" RES_0805 103.378,121.793 r90 top
R47 "10K" RES_0805 89.154,117.033 r90 top
R48 "220R" RES_0805 106.172,112.395 r270 top
R49 "10K" RES_0805 103.505,112.395 r90 top
R50 "10K" RES_0805 89.154,107.63 r90 top
R51 "220R" RES_0805 106.045,102.362 r270 top
R52 "10K" RES_0805 103.378,102.362 r90 top
R53 "10K" RES_0805 89.154,98.171 r90 top
R54 "220R" RES_0805 106.172,92.837 r270 top
R55 "10K" RES_0805 103.505,92.837 r90 top
R56 "10K" RES_0805 89.281,88.646 r90 top
R57 "10K" RES_0805 133.096,49.403 r180 top
S1 "FSM8JH" SW_FSM8JH 110.871,89.916 r270 top
SP "B4B-XH-A" JST_B4B-XH-A 167.319,121.776 r180 top
STL "B4B-XH-A" JST_B4B-XH-A 150.181,121.776 r180 top
U1 "MT2492" "PCBComponent_1 - duplicate" 104.113,35.179 r0 top
U2 "AMS1117-3.3" SOT229P700X180-4N 93.704,58.141 r90 top
U3 "STM32F103C8T6" QFP50P900X900X160-48N 133.219,82.561 r0 top
U4 "MCP2551-I/SN" SOIC127P599X175-8N#2 141.859,94.234 r90 bottom
U5 "TPA3118D2DAPR" SOP65P810X120-33N 163.542,100.24 r270 top
UART "B4B-XH-A" JST_B4B-XH-A 136.906,121.793 r180 top
VCC3V3 "3-644456-2" TE_3-644456-2 84.963,51.689 r0 top
VCC5V "3-644456-2" TE_3-644456-2 95.885,48.006 r180 top
Y1 "8Mhz" XTAL_ECS-80-20-5PVX 117.348,82.118 r90 top

## Footprints (in the part's own frame and the unit in brackets; to place one, negate y for a bottom-side part, rotate by r counter-clockwise, add the part's x,y. Pads: shape width x height; smd on the part's side, far side on the other; paste and mask are expansions set on the pad)
CAP_0805 [mm]
  rrect25% 1.4x1.7 smd: 1(-1.143,0) 2(1.143,0)
  body extent -1.15,-0.76 1.15,0.79, height 1.01
CAP_EEEFT1E471AP [mm]
  rect 4x2 smd: 1(-3.55,0) 2(3.55,0)
  silkscreen extent -4.9,-4.15 4.15,4.15, body extent -4.85,-4.15 4.85,4.15, height 10.2
CUI_PJ-002B [mm]
  oval 2.5x5 hole 1 square: 1(0,0)
  oval 2.25x4.5 hole 1 square: 2(5.969,0.381)
  oval 4.5x2.25 hole 1 square: 3(3,4.7)
  silkscreen extent -2.2,-4.5 13.7,4.5, body extent -0.81,-4.63 13.59,4.77, height 11
DIO_PESD1LIN [mm]
  rect 0.6x0.6 smd paste-0.05: 1(-1.1,0) 2(1.1,0)
  silkscreen extent -2.1,-0.63 0.85,0.63, body extent -1.34,-0.65 1.34,0.65, height 1.15
DO-214AC [mm]
  rect 1.8x1.7 smd: A(2.05,0) C(-2.05,0)
  silkscreen extent -1,-1.05 0.65,1.05
FUSRR508W60L835T400H810 [mm]
  round 1.35 hole 0.9: 1(-2.54,0) 2(2.54,0)
  silkscreen extent -4.18,-2 4.18,2, body extent -4.18,-2 4.18,2, height 8.1
IND_CDRH127/LDNP-470MC_SUM [mil]
  rect 114x213 smd: 1(-195,0) 2(195,0)
  silkscreen extent -285,-247 247,247, body extent -236,-236 236,236, height 315
IND_SLF6028T-100M1R3-PF [mm]
  rect 1.5x2.2 smd: 1(-2.75,0) 2(2.75,0)
  silkscreen extent -3,-3 3,3, body extent -3,-3 3,3, height 3
JST_B4B-XH-A [mm]
  rect 1.508x1.508 / inner round 1.508 / far side rect 1.508x1.508 hole 1: 1(3.75,-0.525)
  round 1.508 hole 1: 2(1.25,-0.525) 3(-1.25,-0.525) 4(-3.75,-0.525)
  silkscreen extent -6.2,-2.88 7.1,2.88, body extent -6.2,-2.88 6.2,2.88, height 7
LED_0805_BLUE [mm]
  rrect25% 1x1.7 smd: A(0.95,0) K(-0.95,0)
  silkscreen extent -1.8,-1.2 -0.9,1.2, body extent -1,-0.63 1,0.63, height 1.12
MODULE_GY-521 [mm]
  round 1.905 hole 1.27 mask+0.102: AD0(-6.33,-6.35) GND(-6.33,6.35) INT(-6.33,-8.89) SCL(-6.33,3.81) SDA(-6.33,1.27) VCC(-6.33,8.89) XCL(-6.33,-3.81) XDA(-6.33,-1.27)
  round 3.2 hole 3.2 unplated mask+0: ""(5.43,8.06) ""(5.43,-8.06)
  silkscreen extent -7.85,-10.15 7.85,10.15, body extent -7.85,-10.15 7.85,10.15, height 3
"PCBComponent_1 - duplicate" [mm]
  rrect25% 1.37x0.59 smd: 1(-10.949,0.442) 2(-10.949,-0.508) 3(-10.949,-1.458) 4(-8.609,-1.458) 5(-8.609,-0.508) 6(-8.609,0.442)
  silkscreen extent -12.38,0.34 -12.18,0.54, body extent -11.18,-1.97 -8.38,0.95, height 1.4
QFP50P900X900X160-48N [mm]
  rrect50% 1.56x0.28 smd: 1(-4.18,2.75) 2(-4.18,2.25) 3(-4.18,1.75) 4(-4.18,1.25) 5(-4.18,0.75) 6(-4.18,0.25) 7(-4.18,-0.25) 8(-4.18,-0.75) 9(-4.18,-1.25) 10(-4.18,-1.75) 11(-4.18,-2.25) 12(-4.18,-2.75) 25(4.18,-2.75) 26(4.18,-2.25) 27(4.18,-1.75) 28(4.18,-1.25) 29(4.18,-0.75) 30(4.18,-0.25) 31(4.18,0.25) 32(4.18,0.75) 33(4.18,1.25) 34(4.18,1.75) 35(4.18,2.25) 36(4.18,2.75)
  rrect50% 0.28x1.56 smd: 13(-2.75,-4.18) 14(-2.25,-4.18) 15(-1.75,-4.18) 16(-1.25,-4.18) 17(-0.75,-4.18) 18(-0.25,-4.18) 19(0.25,-4.18) 20(0.75,-4.18) 21(1.25,-4.18) 22(1.75,-4.18) 23(2.25,-4.18) 24(2.75,-4.18) 37(2.75,4.18) 38(2.25,4.18) 39(1.75,4.18) 40(1.25,4.18) 41(0.75,4.18) 42(0.25,4.18) 43(-0.25,4.18) 44(-0.75,4.18) 45(-1.25,4.18) 46(-1.75,4.18) 47(-2.25,4.18) 48(-2.75,4.18)
  silkscreen extent -6.15,-3.6 3.6,3.6, body extent -4.5,-4.5 4.5,4.5, height 1.6
RES_0805 [mm]
  rrect25% 1x1.7 smd: 1(-0.95,0) 2(0.95,0)
  body extent -1,-0.63 1,0.63, height 0.47
SOIC127P599X175-8N#1 [mm]
  rrect25% 1.97x0.6 smd paste+0 mask+0.102: 1(-2.47,1.905) 2(-2.47,0.635) 3(-2.47,-0.635) 4(-2.47,-1.905) 5(2.47,-1.905) 6(2.47,-0.635) 7(2.47,0.635) 8(2.47,1.905)
  silkscreen extent -4.2,-2.6 1.95,2.6, body extent -3,-2.45 3,2.45, height 1.75
SOIC127P599X175-8N#2 [mm]
  rrect25% 1.58x0.6 smd: 1(-2.67,1.905) 2(-2.67,0.635) 3(-2.67,-0.635) 4(-2.67,-1.905) 5(2.67,-1.905) 6(2.67,-0.635) 7(2.67,0.635) 8(2.67,1.905)
  silkscreen extent -4.35,-2.52 1.99,2.6
SOIC254P960X420-4N [mm]
  rrect25% 2.15x1.48 smd: 1(-4.28,1.27) 2(-4.28,-1.27) 3(4.28,-1.27) 4(4.28,1.27)
  silkscreen extent -6.03,-2.33 3.25,2.33, body extent -4.8,-2.3 4.8,2.3, height 4.2
SOP65P810X120-33N [mm]
  rrect50% 1.57x0.41 smd: 1(-3.72,4.875) 2(-3.72,4.225) 3(-3.72,3.575) 4(-3.72,2.925) 5(-3.72,2.275) 6(-3.72,1.625) 7(-3.72,0.975) 8(-3.72,0.325) 9(-3.72,-0.325) 10(-3.72,-0.975) 11(-3.72,-1.625) 12(-3.72,-2.275) 13(-3.72,-2.925) 14(-3.72,-3.575) 15(-3.72,-4.225) 16(-3.72,-4.875) 17(3.72,-4.875) 18(3.72,-4.225) 19(3.72,-3.575) 20(3.72,-2.925) 21(3.72,-2.275) 22(3.72,-1.625) 23(3.72,-0.975) 24(3.72,-0.325) 25(3.72,0.325) 26(3.72,0.975) 27(3.72,1.625) 28(3.72,2.275) 29(3.72,2.925) 30(3.72,3.575) 31(3.72,4.225) 32(3.72,4.875)
  rect 3.71x3.81 smd paste-3: 33(0,0)
  silkscreen extent -3.1,-5.56 3.1,5.55, body extent -4.05,-5.5 4.05,5.5, height 1.2
SOT95P240X120-3N [mm]
  rrect25% 1.32x0.6 smd paste+0 mask+0.102: 1(-1,0.95) 2(-1,-0.95) 3(1,0)
  silkscreen extent -2.45,-1.45 0.65,1.45, body extent -1.3,-1.52 1.3,1.52, height 1.3
SOT95P280X125-3N#1 [mm]
  rrect25% 1.21x0.59 smd: 1(-1.255,0.95) 2(-1.255,-0.95) 3(1.255,0)
  silkscreen extent -2.6,-1.56 0.9,1.56, body extent -1.4,-1.45 1.4,1.45, height 1.25
SOT95P280X125-3N#2 [mm]
  rrect50% 1.21x0.59 smd: 1(-1.255,0.95) 2(-1.255,-0.95) 3(1.255,0)
  silkscreen extent -2.41,-1.55 0.9,1.55, body extent -1.4,-1.45 1.4,1.45, height 1.25
SOT229P700X180-4N [mm]
  rrect15% 1.31x0.93 smd: 1(-3.345,2.29) 2(-3.345,0) 3(-3.345,-2.29)
  rrect15% 1.31x3.24 smd: 4(3.345,0)
  silkscreen extent -5.1,-3.25 1.75,3.25, body extent -3.5,-3.25 3.5,3.25, height 1.8
SW_FSM8JH [mm]
  rect 1.498x1.498 / inner round 1.498 / far side rect 1.498x1.498 hole 0.99: 1(-3.25,2.25)
  round 1.498 hole 0.99: 2(-3.25,-2.25) 3(3.25,2.25) 4(3.25,-2.25)
  silkscreen extent -4.95,-3 3,3, body extent -3.95,-3 3.95,3, height 9.5
TE_3-644456-2 [mm]
  rect 1.37x1.37 / inner round 1.37 / far side rect 1.37x1.37 hole 1.02: 1(0,0)
  round 1.37 hole 1.02: 2(2.54,0)
  silkscreen extent -1.87,-1.17 3.66,1.17, body extent -1.12,-1.17 3.66,1.17, height 10.03
TE_9-6437287-8 [mm]
  rect 2.25x2.25 hole 1.5: 1(9,14.5)
  round 2.25 hole 1.5: 2(6,14.5) 3(3,14.5) 4(0,14.5) 5(-3,14.5) 6(-6,14.5) 7(-9,14.5) 8(7.5,12) 9(4.5,12) 10(1.5,12) 11(-1.5,12) 12(-4.5,12) 13(-7.5,12) 14(7.5,9) 15(4.5,9) 16(1.5,9) 17(-1.5,9) 18(-4.5,9) 19(-7.5,9) 20(9,6.5) 21(6,6.5) 22(3,6.5) 23(0,6.5) 24(-3,6.5) 25(-6,6.5) 26(-9,6.5)
  round 3.4 hole 3.4 unplated: ""(-16.25,0) ""(16.25,0)
  silkscreen extent -19.75,-19.5 19.75,18.31
TRANS_IRF4905STRRPBF [mm]
  rect 3.81x2.08 smd: 1(-6.985,2.54) 3(-6.985,-2.54)
  rect 8.89x11.43 smd paste-7: 2(4.445,0)
  silkscreen extent -7.08,-5.08 -0.32,5.08, body extent -7.62,-5.08 7.62,5.08, height 4.83
XTAL_ECS-80-20-5PVX [mm]
  rect 5.5x2 smd: 1(-4.75,0) 2(4.75,0)
  silkscreen extent -5.7,-2.4 5.7,2.4, body extent -6.6,-2.35 6.6,2.35, height 2.6

## Part data
BUF1 BUF2 BUF3: "Dual, 5.5-V, 10-MHz operational amplifier", Package="SOIC-8 Texas Instruments", Check_prices=https://www.snapeda.com/parts/TLV9062IDR/Texas+Instruments/view-part/?ref=eda, MF="Texas Instruments", MP=TLV9062IDR, SnapEDA_Link=https://www.snapeda.com/parts/TLV9062IDR/Texas+Instruments/view-part/?ref=snap
C1 C2 C3 C4 C5 C6 C7 C8 C9 C10 C11 C12 C13 C14 C15 C16 C17 C18 C19 C20 C21 C22 C23 C24 C25 C26 C31 C32 C33 C34 C35 C36 C37 C38 C39 C40 C60: library part CAP_0805, "Capacitor SMD 0805"
C27 C28 C29 C30: library part EEEFT1E471AP, "Cap Aluminum Lytic 470uF 25V 20% (8 X 10.2mm) SMD 0.08 Ohm 850mA 2000h 105C Automotive T/R", Package="RADIAL-2 Panasonic", Check_prices=https://www.snapeda.com/parts/EEEFT1E471AP/Panasonic/view-part/?ref=eda, MF=Panasonic, MP=EEEFT1E471AP, SnapEDA_Link=https://www.snapeda.com/parts/EEEFT1E471AP/Panasonic/view-part/?ref=snap
D1: "44V, 70V Clamp 3A (8/20Âµs) Ipp Tvs Diode Surface Mount SOD-323", Package="SOD-323 Vishay Semiconductor Diodes Division", Check_prices=https://www.snapeda.com/parts/PESD1LIN/Nexperia/view-part/?ref=eda, MF="Nexperia USA", MP=PESD1LIN, SnapEDA_Link=https://www.snapeda.com/parts/PESD1LIN/Nexperia/view-part/?ref=snap
D2 D3 D4 D5 D6 D7 D8 D9 D10 D11 D12: library part LED_0805_BLUE, "LED 0805 BLUE SMD"
D13 D14 D14 D15: "Schottky barrier diode, 3A, 40V", Package=None, Check_prices=https://www.snapeda.com/parts/SS34A/HY+Electronic/view-part/?ref=eda, MF="hy electronic corp", MP=SS34A, SnapEDA_Link=https://www.snapeda.com/parts/SS34A/HY+Electronic/view-part/?ref=snap
F1: "2-Pin Radial Fuse", Package="Radial Box  Bel Fuse", Check_prices=https://www.snapeda.com/parts/0697H0315-01/Bel+Circuit+Protection/view-part/?ref=eda, MF="Bel Fuse", MP=0697H0315-01, SnapEDA_Link=https://www.snapeda.com/parts/0697H0315-01/Bel+Circuit+Protection/view-part/?ref=snap
GPIO GPIO GPIO SP STL UART: "Connector Header Through Hole 4 position 0.098 (2.50mm)", Package=None, Check_prices=https://www.snapeda.com/parts/B4B-XH-A/JST/view-part/?ref=eda, MF="JST Sales", MP=B4B-XH-A, SnapEDA_Link=https://www.snapeda.com/parts/B4B-XH-A/JST/view-part/?ref=snap
IMU: "Triple Axis Accelerometer Gyro Breakout", Package=Package, Check_prices=https://www.snapeda.com/parts/GY-521/GODREAM+FORDREAM+CO.%252C+LIMITED/view-part/?ref=eda, MF="GODREAM FORDREAM CO., LIMITED", MP=GY-521, SnapEDA_Link=https://www.snapeda.com/parts/GY-521/GODREAM+FORDREAM+CO.%252C+LIMITED/view-part/?ref=snap
J1: "2.5 x 6.5 mm, 2.5 A, Horizontal, Through Hole, Dc Power Jack Connector", Package=None, Check_prices=https://www.snapeda.com/parts/PJ-002B/Same+Sky/view-part/?ref=eda, MF="Same Sky", MP=PJ-002B, SnapEDA_Link=https://www.snapeda.com/parts/PJ-002B/Same+Sky/view-part/?ref=snap
J10 U4: Package=None, Availability=Unavailable, Price=None
  J10: MF="{'manufacturer': 'TE Connectivity'}", MP=9-6437287-8
  U4: MP=MCP2551-I/SN
L1: "10 ÂµH Shielded Drum Core, Wirewound Inductor 1.8 A 63.8mOhm Max Nonstandard", Package="NON STANDARD-2 TDK", Availability="In Stock", Check_prices=https://www.snapeda.com/parts/SLF6028T-100M1R3-PF/TDK/view-part/?ref=eda, MF=TDK, MP=SLF6028T-100M1R3-PF, Price=None, Purchase-URL=https://pricing.snapeda.com/search/part/SLF6028T-100M1R3-PF/?ref=eda, SnapEDA_Link=https://www.snapeda.com/parts/SLF6028T-100M1R3-PF/TDK/view-part/?ref=snap
L2 L3: library part CDRH127/LDNP-470MC, "Inductor Power Shielded Drum Core 47uH 20% 1KHz Ferrite 4.1A 0.078Ohm DCR T/R", Package="Non Standard Sumida", Check_prices=https://www.snapeda.com/parts/CDRH127/LDNP-470MC/Sumida/view-part/?ref=eda, MF="Sumida Corporation", MP=CDRH127/LDNP-470MC, SnapEDA_Link=https://www.snapeda.com/parts/CDRH127/LDNP-470MC/Sumida/view-part/?ref=snap
OC1 OC2 OC3 OC4 OC5: library part PC817X1NIP1B, "Optoisolator Transistor Output 1 Channel 4-SMD", Package=None, Check_prices=https://www.snapeda.com/parts/PC817X1NIP1B/Sharp+Microelectronics/view-part/?ref=eda, MF="Sharp Microelectronics", MP=PC817X1NIP1B, SnapEDA_Link=https://www.snapeda.com/parts/PC817X1NIP1B/Sharp+Microelectronics/view-part/?ref=snap
Q1: "RoHS Compliant", Package="D2PAK Infineon", Availability="In Stock", Check_prices=https://www.snapeda.com/parts/IRF4905STRRPBF/Infineon+Technologies/view-part/?ref=eda, MF="Infineon Technologies", MP=IRF4905STRRPBF, Price=None, Purchase-URL=https://pricing.snapeda.com/search/part/IRF4905STRRPBF/?ref=eda, SnapEDA_Link=https://www.snapeda.com/parts/IRF4905STRRPBF/Infineon+Technologies/view-part/?ref=snap
Q2: "BJT, SOT-23, 45V, 800mA, NPN, 0.31W, 150Â°C", Package="SOT-23 Diotec", Check_prices=https://www.snapeda.com/parts/BC817-40/Diotec/view-part/?ref=eda, MF="Diotec Semiconductor", MP=BC817-40, SnapEDA_Link=https://www.snapeda.com/parts/BC817-40/Diotec/view-part/?ref=snap
Q3 Q5 Q6 Q7 Q8: "P-Channel 30 V 4.3A (Ta) 1.4W (Ta) Surface Mount SOT-23-3", Package="SOT-23 Alpha &amp; Omega Semiconductor", Check_prices=https://www.snapeda.com/parts/AO3407A/Alpha/view-part/?ref=eda, MF="Alpha &", MP=AO3407A, SnapEDA_Link=https://www.snapeda.com/parts/AO3407A/Alpha/view-part/?ref=snap
Q4: "N-Channel 30 V 5.8A (Ta) 1.4W (Ta) Surface Mount SOT-23", Package=None, Check_prices=https://www.snapeda.com/parts/AO3400A/UMW/view-part/?ref=eda, MF=UMW, MP=AO3400A, SnapEDA_Link=https://www.snapeda.com/parts/AO3400A/UMW/view-part/?ref=snap
R1 R2 R3 R4 R5 R6 R7 R8 R9 R10 R11 R12 R13 R14 R15 R16 R17 R18 R19 R20 R21 R22 R23 R24 R25 R26 R27 R28 R29 R30 R31 R32 R33 R34 R35 R36 R36 R37 R38 R39 R40 R41 R42 R43 R44 R45 R46 R47 R48 R49 R50 R51 R52 R53 R54 R55 R56 R57: library part RES_0805, "Resistor SMD 0805"
S1: "Tactile Switch SPST-NO Top Actuated Through Hole", Package=None, Availability="In Stock", Check_prices=https://www.snapeda.com/parts/FSM8JH/TE+Connectivity+ALCOSWITCH+Switches/view-part/?ref=eda, MF="TE Connectivity", MP=FSM8JH, Price=None, SnapEDA_Link=https://www.snapeda.com/parts/FSM8JH/TE+Connectivity+ALCOSWITCH+Switches/view-part/?ref=snap
U1: "DC-DC step-down converter (buck converter)"
U2: "Sot223/Pkg 1-Amp 3.3-Volt Low Drop Out Voltage Regulatator", Package="SOT-223 Seeed Technology", Check_prices=https://www.snapeda.com/parts/AMS1117-3.3/Advanced+Monolithic+Systems/view-part/?ref=eda, MF="Advanced Monolithic Systems", MP=AMS1117-3.3, SnapEDA_Link=https://www.snapeda.com/parts/AMS1117-3.3/Advanced+Monolithic+Systems/view-part/?ref=snap
U3: "ARM® Cortex®-M3 STM32F1 Microcontroller IC 32-Bit 72MHz 64KB (64K x 8) FLASH 48-LQFP (7x7)", Package="LQFP-48 STMicroelectronics", Check_prices=https://www.snapeda.com/parts/STM32F103C8T6/STMicroelectronics/view-part/?ref=eda, MF=STMicroelectronics, MP=STM32F103C8T6, SnapEDA_Link=https://www.snapeda.com/parts/STM32F103C8T6/STMicroelectronics/view-part/?ref=snap
U5: "30-W stereo, 60-W mono, 4.5- to 26-V supply, analog input Class-D audio amplifier", Package="HTSSOP-32 Texas Instruments", Check_prices=https://www.snapeda.com/parts/TPA3118D2DAPR/Texas+Instruments/view-part/?ref=eda, MF="Texas Instruments", MP=TPA3118D2DAPR, SnapEDA_Link=https://www.snapeda.com/parts/TPA3118D2DAPR/Texas+Instruments/view-part/?ref=snap
VCC3V3 VCC5V: "HEADER ASSEMBLY, NARROW, MTA-100, 2 POSITION, STRAIGHT", Package=None, Check_prices=https://www.snapeda.com/parts/3-644456-2/TE+Connectivity+AMP+Connectors/view-part/?ref=eda, MF="TE Connectivity", MP=3-644456-2, SnapEDA_Link=https://www.snapeda.com/parts/3-644456-2/TE+Connectivity+AMP+Connectors/view-part/?ref=snap
Y1: library part ECS-80-20-5PVX, "SMD Quartz crystal", Package=None, Availability=Unavailable, MP=ECS-80-20-5PVX, Price=None

## Free pads (board coordinates)
  round 1.524 hole 3 unplated: 2(179.197,121.92) 3(179.197,36.068) 4(85.852,36.068) 5(85.852,121.92)

## Via types
v1: diameter 0.45, hole 0.2, Top Layer to Bottom Layer, 265 vias
v2: diameter 0.5, hole 0.2, Top Layer to Bottom Layer, 138 vias

## Nets (pads, with @x,y where several pads share a name; then routed paths per layer and width w, separated by ;. In a path a pad name is that pad's centre, name@x,y a point inside that pad or via, vN(x,y) a via of type N, cw(c..) or ccw(c..) an arc to the next point about the centre after c; other vN are vias at no path point)
AMP_BSNL: C31.2 U5.20 | length 17.7
  Top Layer w0.38: C31.2@160.528,78.867 160.617,78.956 U5.20@160.617,96.52
AMP_BSNR: C32.2 U5.26 | length 18.3
  Top Layer w0.38: U5.26@164.517,96.52 164.517,86.435 166.116,84.836 C32.2@166.116,78.867
AMP_BSPL: C33.2 U5.24 | length 17.7
  Top Layer w0.38: U5.24@163.217,96.52 163.217,78.972 C33.2@163.322,78.867
AMP_BSPR: C34.2 U5.30 | length 18.4
  Top Layer w0.38: U5.30@167.117,96.52 167.117,86.883 168.91,85.09 C34.2@168.91,78.867
AMP_FFN: C39.1 R43.2 | length 2.5
  Top Layer w2: C39.1@156.337,51.943 R43.2@158.877,51.943
AMP_FFP: C40.1 R44.2 | length 2.3
  Top Layer w2: R44.2@177.038,51.943 C40.1@179.324,51.943
AMP_GAIN: R41.1 R42.2 U5.8 | length 11.9
  Top Layer w0.38: U5.8@163.867,103.96 163.852,103.975 163.852,104.88 163.068,105.664 163.068,111.476 164.272,112.68 R41.1@164.272,113.03 R42.2@166.309,113.03
AMP_INN: C20.2 U5.5 | length 3.1
  Top Layer w0.38: C20.2@165.227,106.807 165.307,106.807 165.817,106.297 U5.5@165.817,103.96
AMP_INP: C21.2 U5.4 | length 3.5
  Top Layer w0.38: U5.4@166.467,103.96 166.467,105.53 167.744,106.807 C21.2@167.894,106.807
AMP_MUTE: R40.2 U5.12 | length 3
  Top Layer w0.38: R40.2@161.224,106.934 161.252,106.906 161.252,103.975 U5.12@161.267,103.96
AMP_OUTNL: C31.1 C33.1 L3.2 U5.21 U5.23 | length 31.7
  Top Layer w0.38: U5.21@161.267,96.52 161.282,96.505 161.282,95.512 161.925,94.869 ; 161.925,76.581 161.925,94.869 ; U5.23@162.567,96.52 162.552,96.505 162.552,95.496 161.925,94.869
  Top Layer w2: L3.2@161.29,70.104 161.29,70.298 161.036,70.552 161.036,76.073 C31.1@160.528,76.581 161.925,76.581 C33.1@163.322,76.581
AMP_OUTPR: C32.1 C34.1 L2.2 U5.27 U5.29 | length 35.8
  Top Layer w0.38: U5.27@165.167,96.52 165.182,96.505 165.182,95.549 165.862,94.869 ; U5.29@166.467,96.52 166.452,96.505 166.452,95.459 165.862,94.869 ; 167.513,76.581 167.513,84.963 165.862,86.614 165.862,94.869
  Top Layer w2: C32.1@166.116,76.581 167.513,76.581 C34.1@168.91,76.581 168.443,76.114 168.443,74 171.891,70.552 173.796,70.552 L2.2@174.244,70.104
AMP_PLIMIT: C22.1 R42.1 U5.6 U5.7 | length 16.3
  Top Layer w0.38: U5.6@165.167,103.96 U5.7@164.517,103.96 164.517,105.231 163.83,105.918 163.83,110.236 165.227,111.633 167.162,111.633 168.209,112.68 R42.1@168.209,113.03 167.899,113.34 167.899,114.145 166.497,115.547 C22.1@166.497,115.697
APPS1: BUF1.5 J10.11 R30.2 | length 44.1
  Top Layer w0.25: R30.2@141.031,63.5 141.031,59.624 139.592,58.185 138.075,58.185 136.398,56.508 BUF1.5@136.398,55.823 136.399,54.609 141.097,49.911 146.812,49.911 148.844,47.879 158.496,47.879 161.441,44.934 J10.11@161.441,41.591
APPS2: BUF2.5 J10.12 R32.2 | length 47.9
  Top Layer w0.25: R32.2@133.157,63.5 133.157,63.15 134.077,62.23 135.001,62.23 135.382,61.849 135.382,59.82 134.969,59.407 134.719,59.407 133.497,58.185 132.487,58.185 130.81,56.508 BUF2.5@130.81,55.823 130.811,54.609 132.334,53.086 136.271,53.086 140.517,48.84 146.105,48.84 148.336,46.609 156.718,46.609 158.441,44.886 J10.12@158.441,41.591
BL: D13.C J10.21 Q5.3 | length 154.8
  Top Layer w0.5: v1(95.123,116.967) Q5.3@95.108,116.967 D13.C@97.899,116.967 ; v1(101.203,76.978) 105.918,72.263 105.918,46.609 v1(114.046,38.481) ; v1(125.857,36.195) 125.857,33.401 130.937,28.321 132.588,28.321 134.62,26.289 159.139,26.289 J10.21@168.941,36.091
  Layer 2 w0.5: v1(95.123,116.967) 95.123,83.058 v1(101.203,76.978) ; v1(114.046,38.481) 114.808,37.719 124.333,37.719 v1(125.857,36.195)
BPS: J10.13 R34.2 R36.2@128.016,51.12 | length 48.9
  Top Layer w0.25: R34.2@125.283,63.5 125.283,63.177 125.658,62.802 126.158,62.802 127.12,61.84 127.12,59.426 124.107,56.413 124.107,52.296 124.333,52.07 126.746,52.07 R36.2@127.291,51.525 ; R36.2@128.016,51.12 128.016,50.245 131.144,47.117 145.415,47.117 150.941,41.591 J10.13@155.441,41.591
BS: C3.1 U1.1 | length 2.4
  Top Layer w0.5: U1.1@93.191,35.709 C3.1@93.191,38.1
CAN_N: C17.1 J10.10 U4.6 | length 71.9
  Bottom Layer w0.25: C17.1@140.589,99.568 140.589,99.495 141.16,98.924 141.422,98.924 141.569,98.777 141.569,98.307 141.632,98.243 141.632,97.715 141.486,97.569 141.399,97.569 141.224,97.394 U4.6@141.224,96.904 141.224,96.414 141.399,96.239 141.486,96.239 141.632,96.093 141.632,95.206 144.835,92.003 144.835,58.847 157.595,46.087 163,46.087 164.394,44.693 164.394,43.583 164.767,43.21 164.767,41.917 J10.10@164.441,41.591
CAN_P: C16.1 J10.3 U4.7 | length 69.7
  Bottom Layer w0.25: C16.1@143.002,99.568 143.002,99.495 142.431,98.924 142.169,98.924 142.022,98.777 142.022,98.494 142.086,98.431 142.086,97.715 142.232,97.569 142.319,97.569 142.494,97.394 U4.7@142.494,96.904 142.494,96.414 142.319,96.239 142.232,96.239 142.086,96.093 142.086,95.393 145.288,92.191 145.288,59.035 157.783,46.54 163.188,46.54 165.637,44.091 J10.3@165.941,44.091
CAN_RS: R36.1@146.431,97.089 U4.8 | length 2.7
  Bottom Layer w0.203: U4.8@143.764,96.904 143.949,97.089 R36.1@146.431,97.089
CFB: D14.C@97.899,98.171 J10.22 Q7.3 | length 128.9
  Top Layer w0.5: Q7.3@95.235,98.171 D14.C@97.899,98.171 ; v1(101.981,77.597) 108.585,70.993 108.585,45.847 v1(115.951,38.481) ; v1(128.161,36.211) 128.338,36.034 128.338,36 137.16,27.178 157.028,27.178 J10.22@165.941,36.091
  Layer 2 w0.5: v1(96.139,98.171) 96.139,83.439 v1(101.981,77.597) ; v1(115.951,38.481) 125.892,38.481 v1(128.161,36.211)
CFM: D14.C@98.026,107.569 J10.24 Q6.3 | length 129.4
  Top Layer w0.5: Q6.3@95.108,107.569 D14.C@98.026,107.569 ; v1(102.616,78.232) 112.141,68.707 112.141,44.069 117.856,38.354 127.381,38.354 135.255,30.48 142.621,30.48 144.145,32.004 158.623,32.004 159.865,33.246 159.865,36.015 J10.24@159.941,36.091
  Layer 2 w0.5: v1(97.409,107.061) 97.409,83.439 v1(102.616,78.232)
DC_Fuse_12V: D1.2 F1.2 Q1.2 | length 13
  Top Layer w2: Q1.2@118.618,31.623 120.142,30.099 F1.2@126.111,30.099 129.54,26.67 D1.2@129.583,26.67
DC_IN_12V: F1.1 J1.2 J10.25 | length 35.1
  Layer 2 w2: F1.1@131.191,30.099 133.749,30.099 ; J1.2@138.303,33.528 137.178,33.528 133.749,30.099 ; J10.25@156.941,36.091 156.893,36.043 156.893,34.592 154.94,32.639 143.002,32.639 140.462,30.099 133.749,30.099
DTI_APPS1: BUF1.6 BUF1.7 J10.4 | length 32.1
  Top Layer w0.25: BUF1.6@137.668,55.823 BUF1.7@138.938,55.823 138.938,52.832 141.224,50.546 146.945,50.546 149.104,48.387 159.004,48.387 162.941,44.45 J10.4@162.941,44.091
DTI_APPS2: BUF2.6 BUF2.7 J10.5 | length 33.8
  Top Layer w0.25: BUF2.6@132.08,55.823 BUF2.7@133.35,55.823 133.35,54.483 134.239,53.594 136.525,53.594 140.826,49.293 146.541,49.293 148.59,47.244 157.353,47.244 159.413,45.184 159.413,45.16 159.941,44.632 J10.5@159.941,44.091
DTI_BPS: BUF3.6 BUF3.7 J10.6 | length 36.1
  Top Layer w0.25: BUF3.6@126.492,55.823 BUF3.7@127.762,55.823 127.762,54.483 128.016,54.229 128.651,54.229 130.429,52.451 136.144,52.451 140.208,48.387 145.796,48.387 148.209,45.974 155.058,45.974 J10.6@156.941,44.091
DTI_RTD: J10.7 R57.1 U3.25 | length 58.8
  Top Layer w0.25: v1(130.048,54.483) v1(130.048,59.563) ; R57.1@134.046,49.403 136.779,49.403 138.557,47.625 145.796,47.625 149.33,44.091 J10.7@153.941,44.091 ; U3.25@137.399,79.811 137.399,73.124 v1(139.149,71.374)
  Layer 2 w0.25: v1(130.048,54.483) 130.086,54.445 130.34,54.445 134.201,50.584 134.201,50.076 v1(134.239,50.038) ; v1(130.048,59.563) 130.937,59.563 132.334,60.96 132.334,63.881 139.149,70.696 v1(139.149,71.374)
FB: R3.2 R4.1 U1.3 | length 9
  Top Layer w0.5: R4.1@88.011,38.293 88.142,38.293 88.392,38.043 88.392,35.022 89.82,33.594 R3.2@90.17,33.594 ; R3.2@90.17,33.34 90.52,33.34 90.901,33.721 U1.3@93.164,33.721